# Altium PCB 8SoundsUSB.PcbDoc (part 1 of 3)
Units mm, origin at the board's own origin, x right, y up, seen from the top; angles counter-clockwise.
Board outline 126.1 x 74.1 mm, 4 copper layers (Top Layer, GND PLANE, POWER PLANE, Bottom Layer); 415 components, 227 nets, 1234 pads, 311 vias.
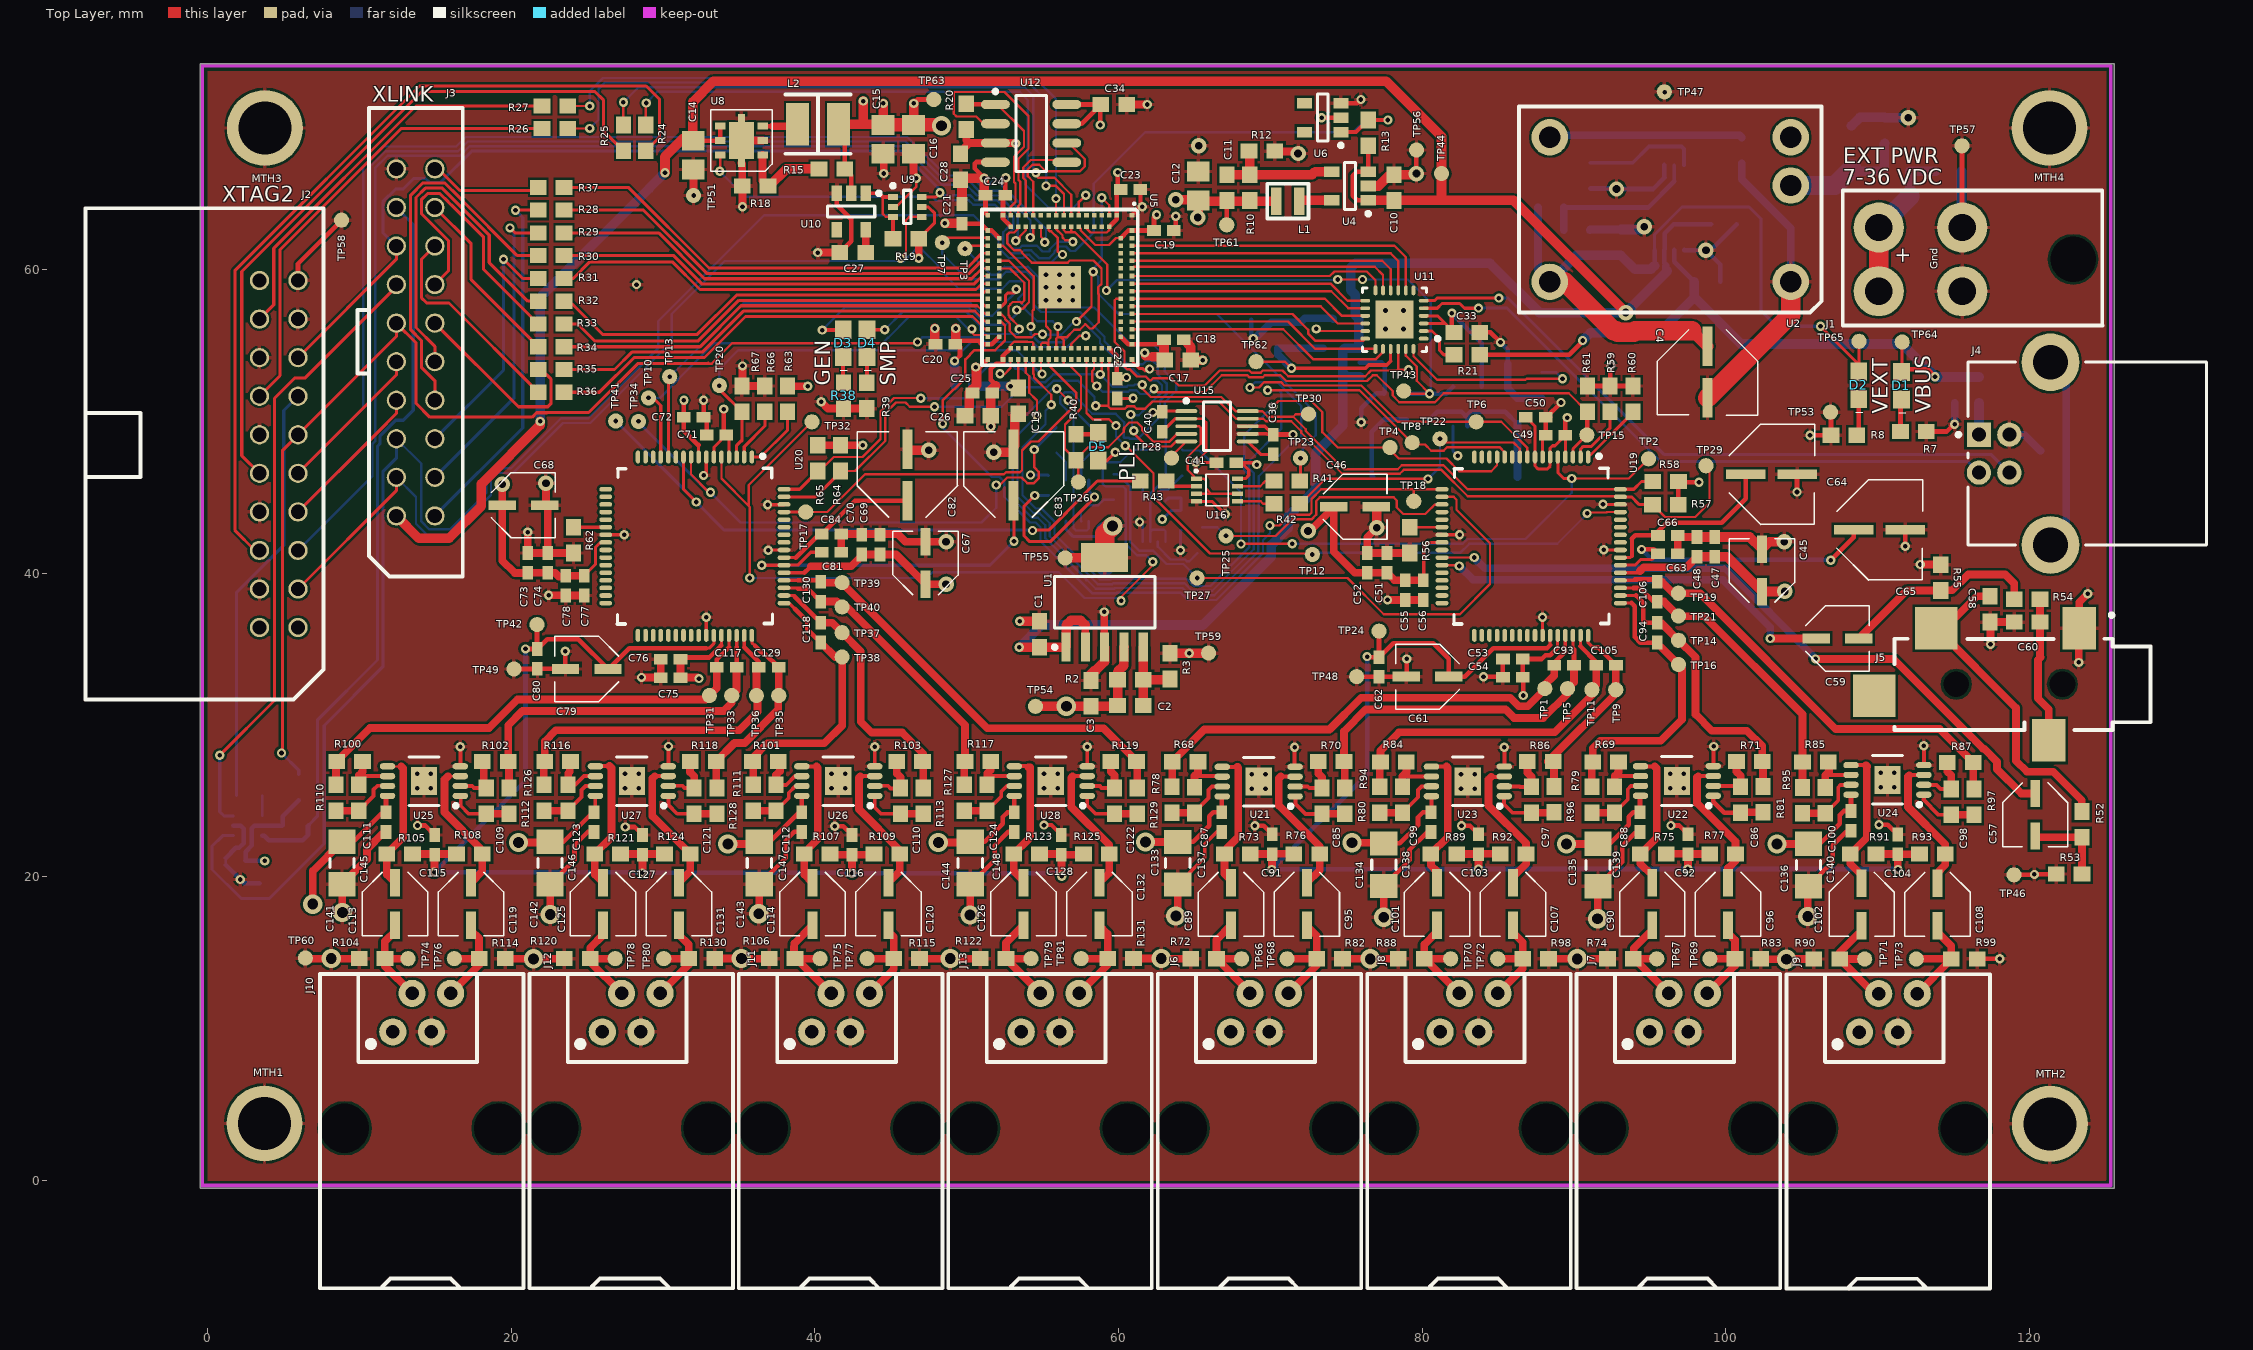
[diagram p0: Top Layer view]
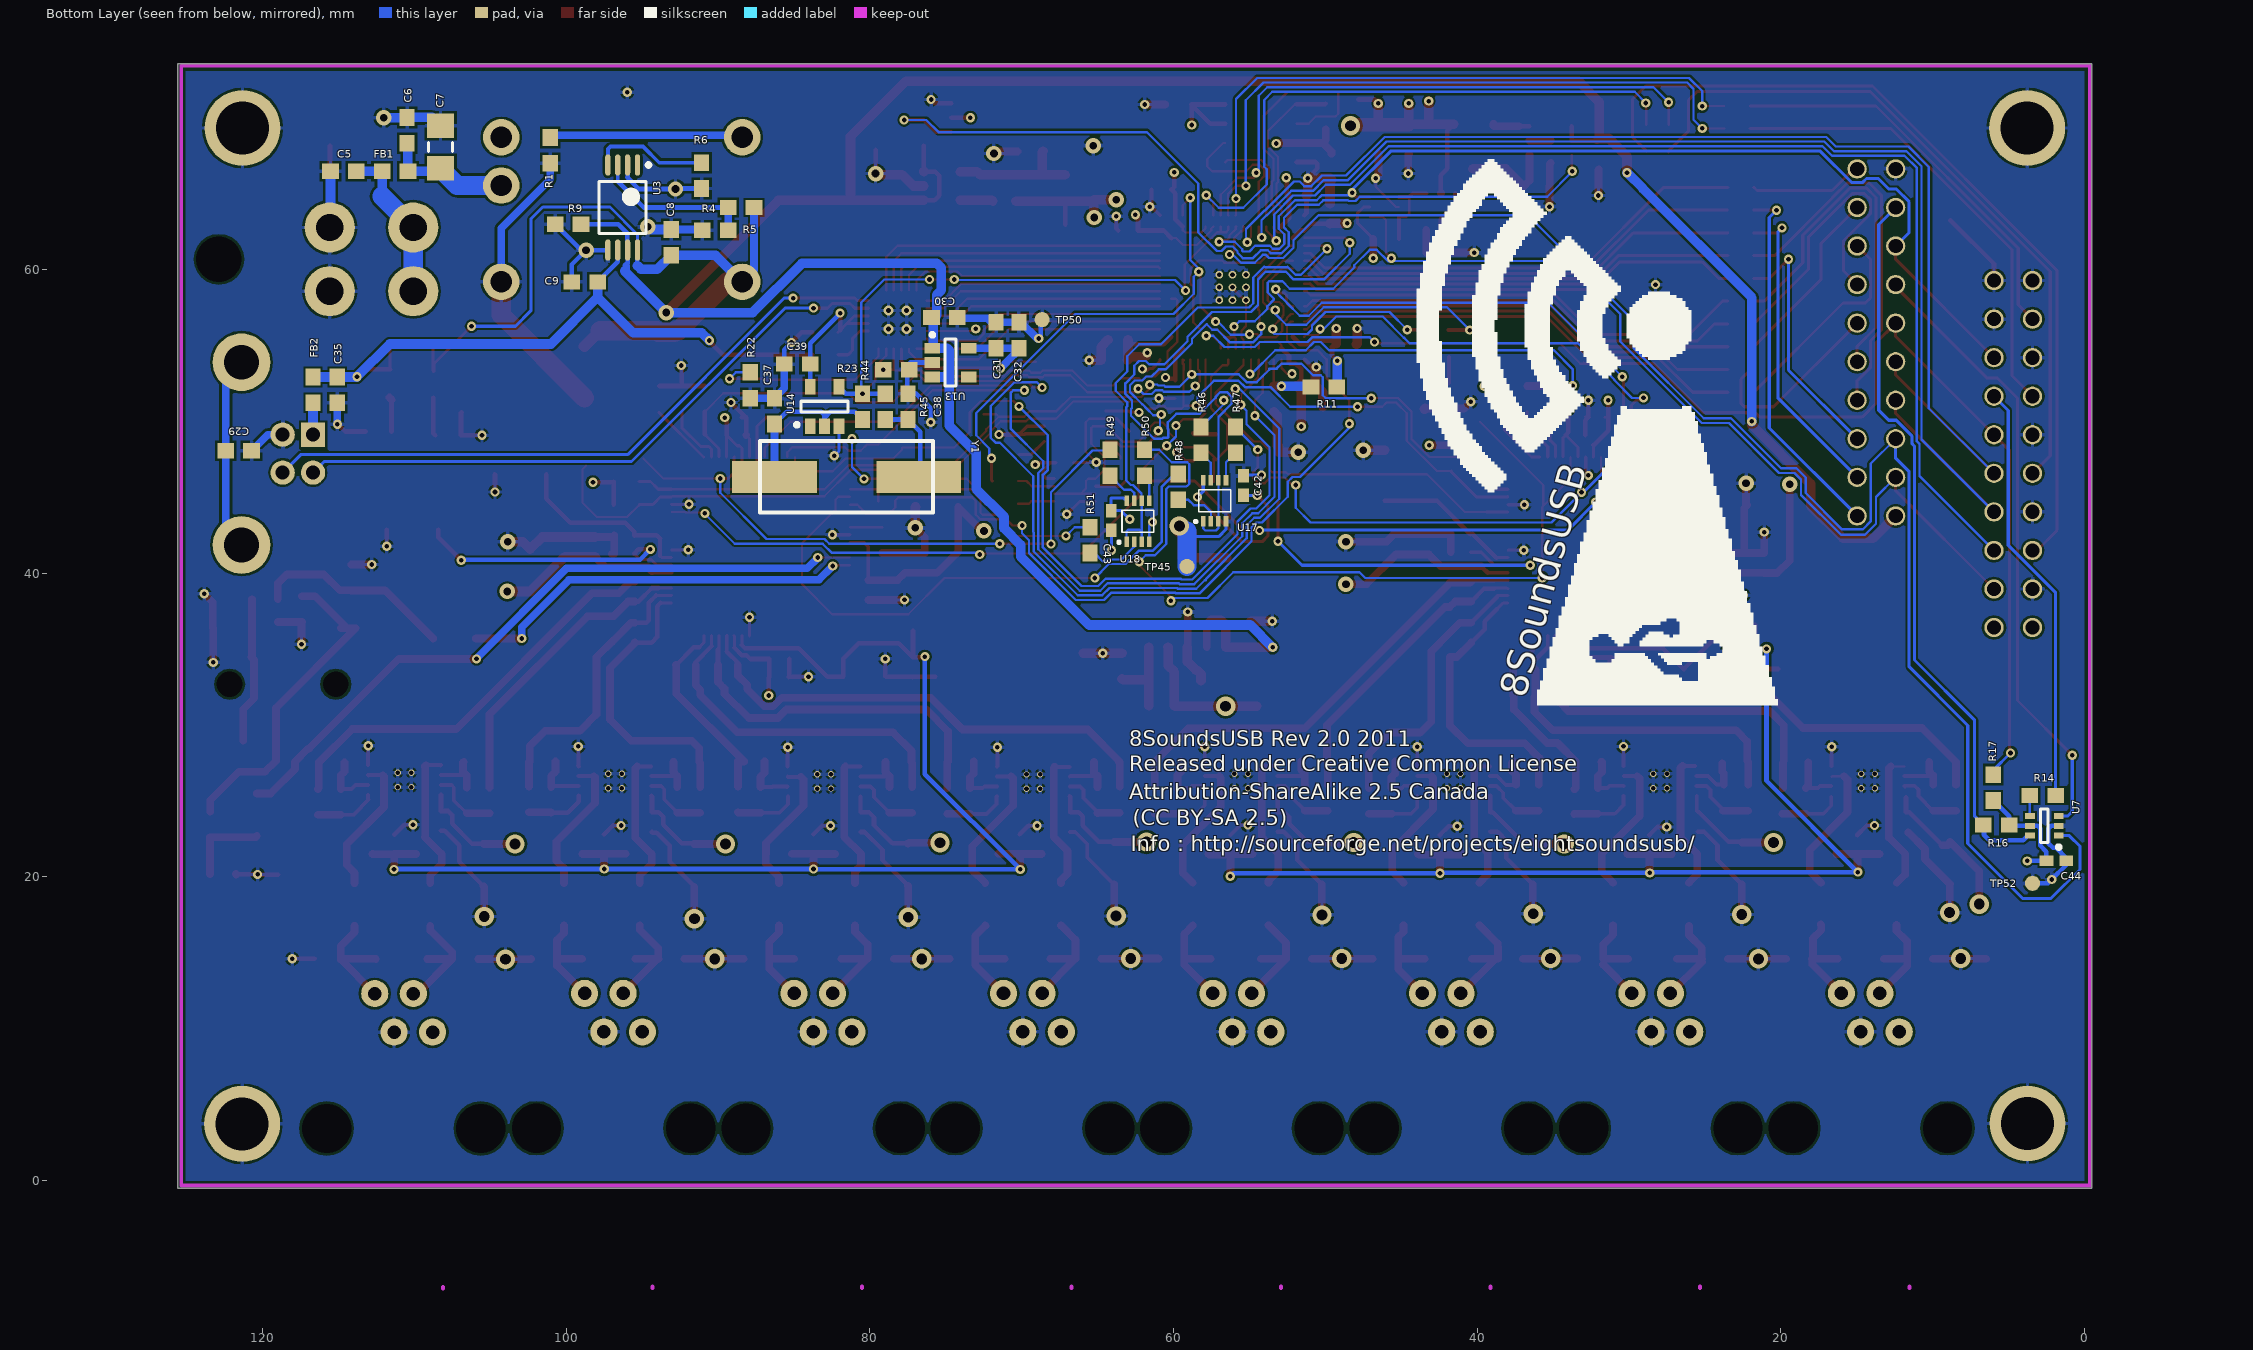
[diagram p1: Bottom Layer view, seen from below]
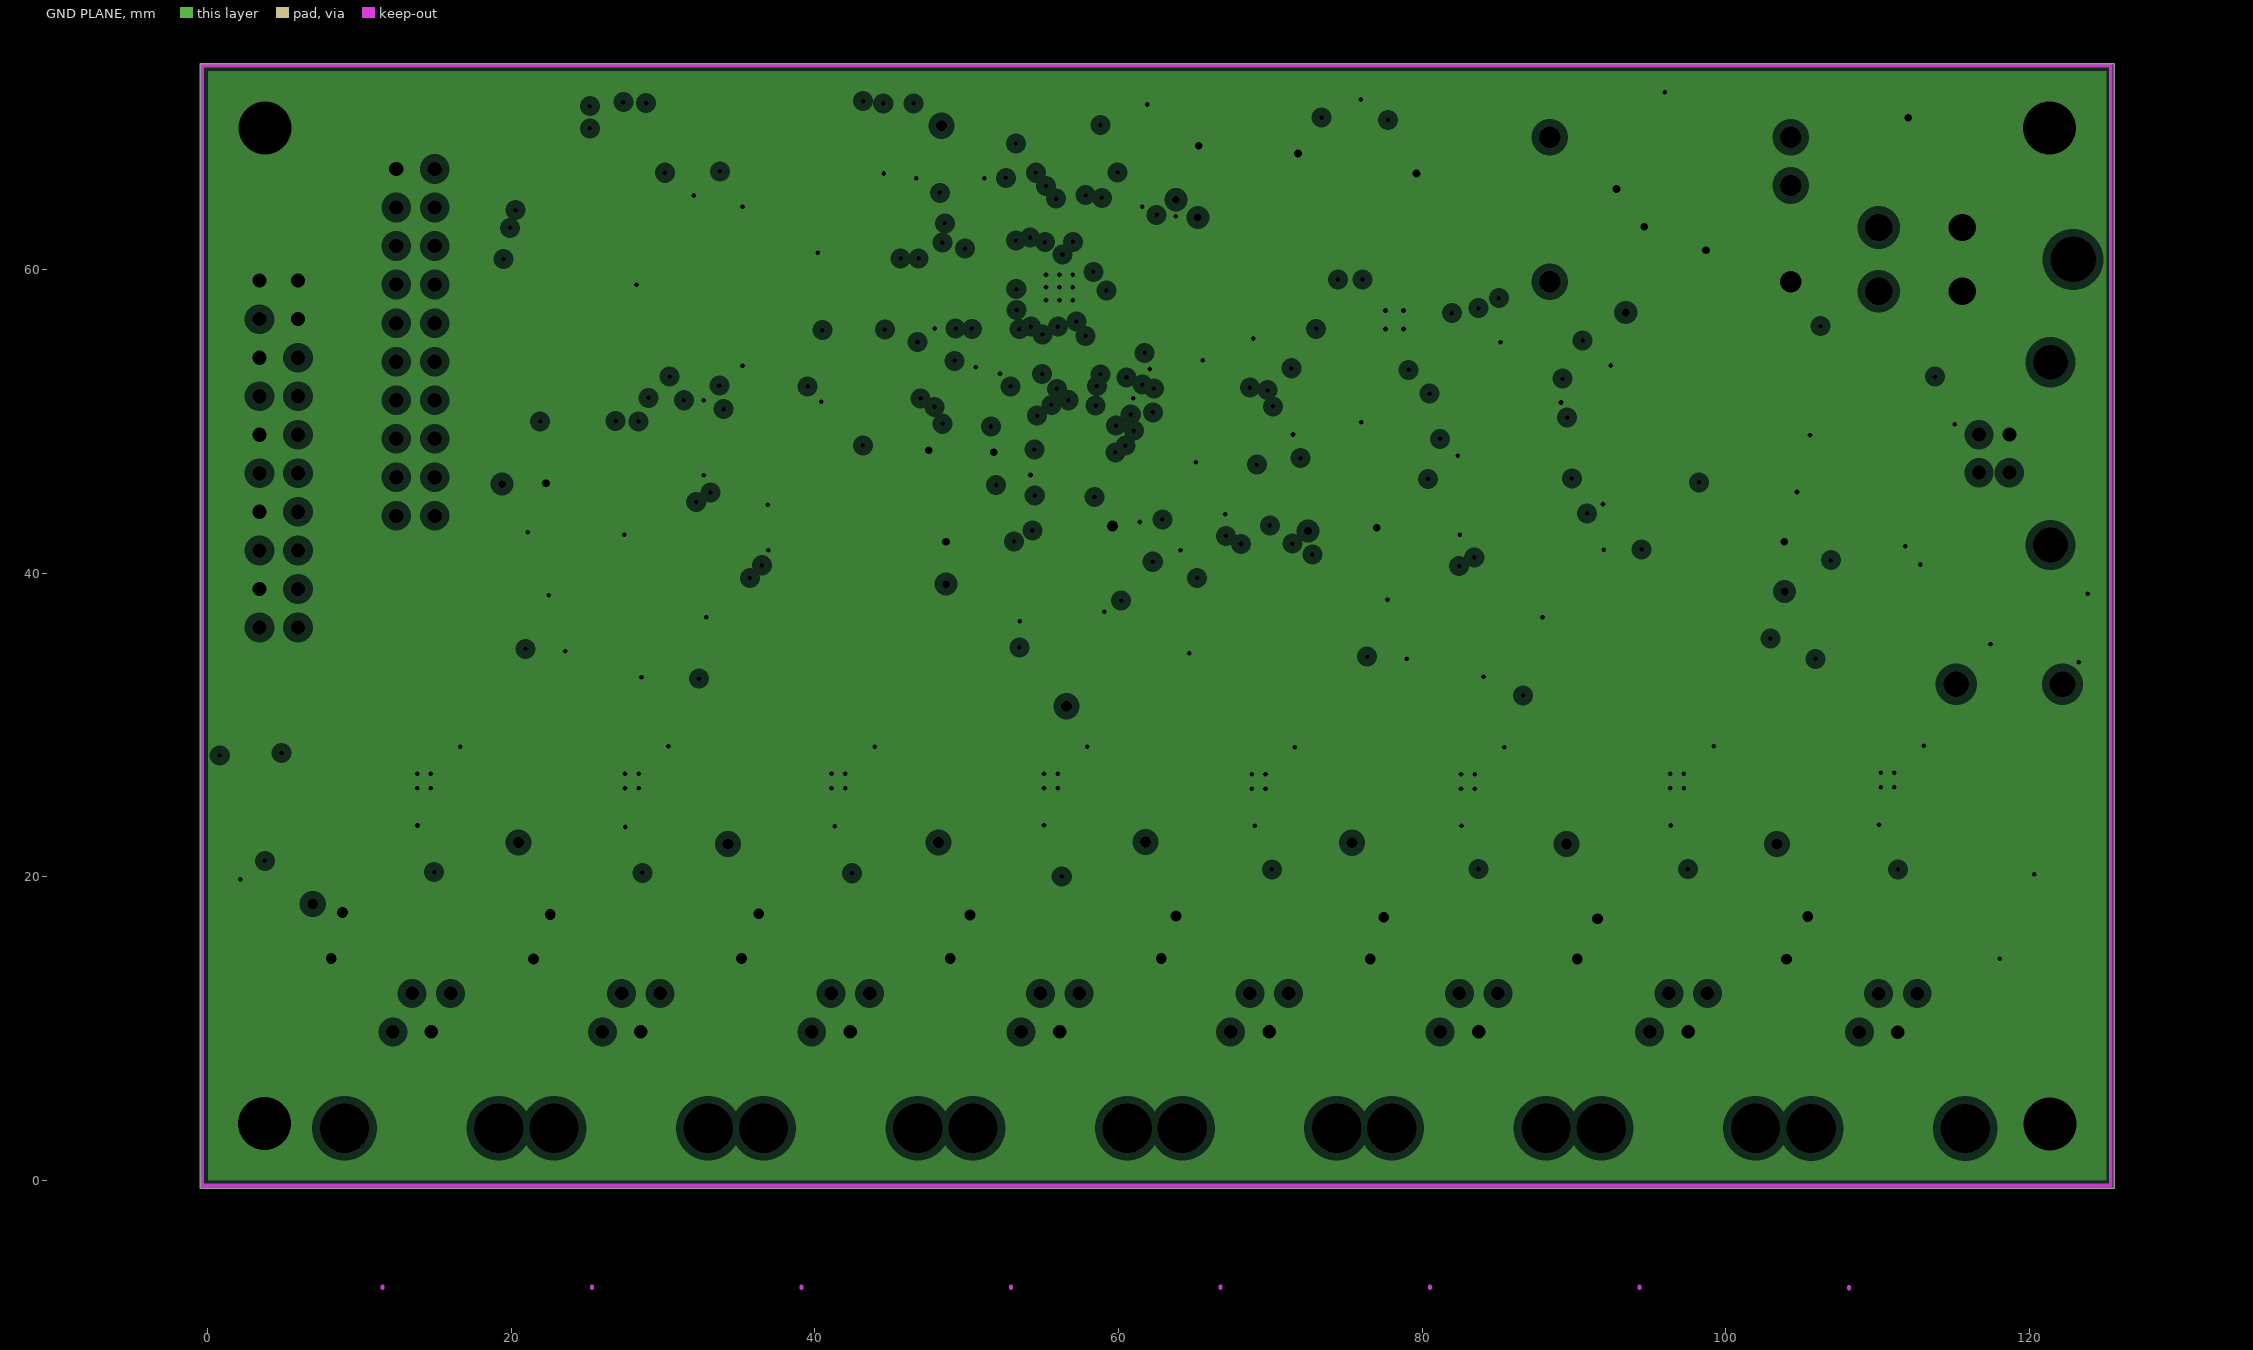
[diagram p2: GND PLANE, clearances drawn from the general rule]
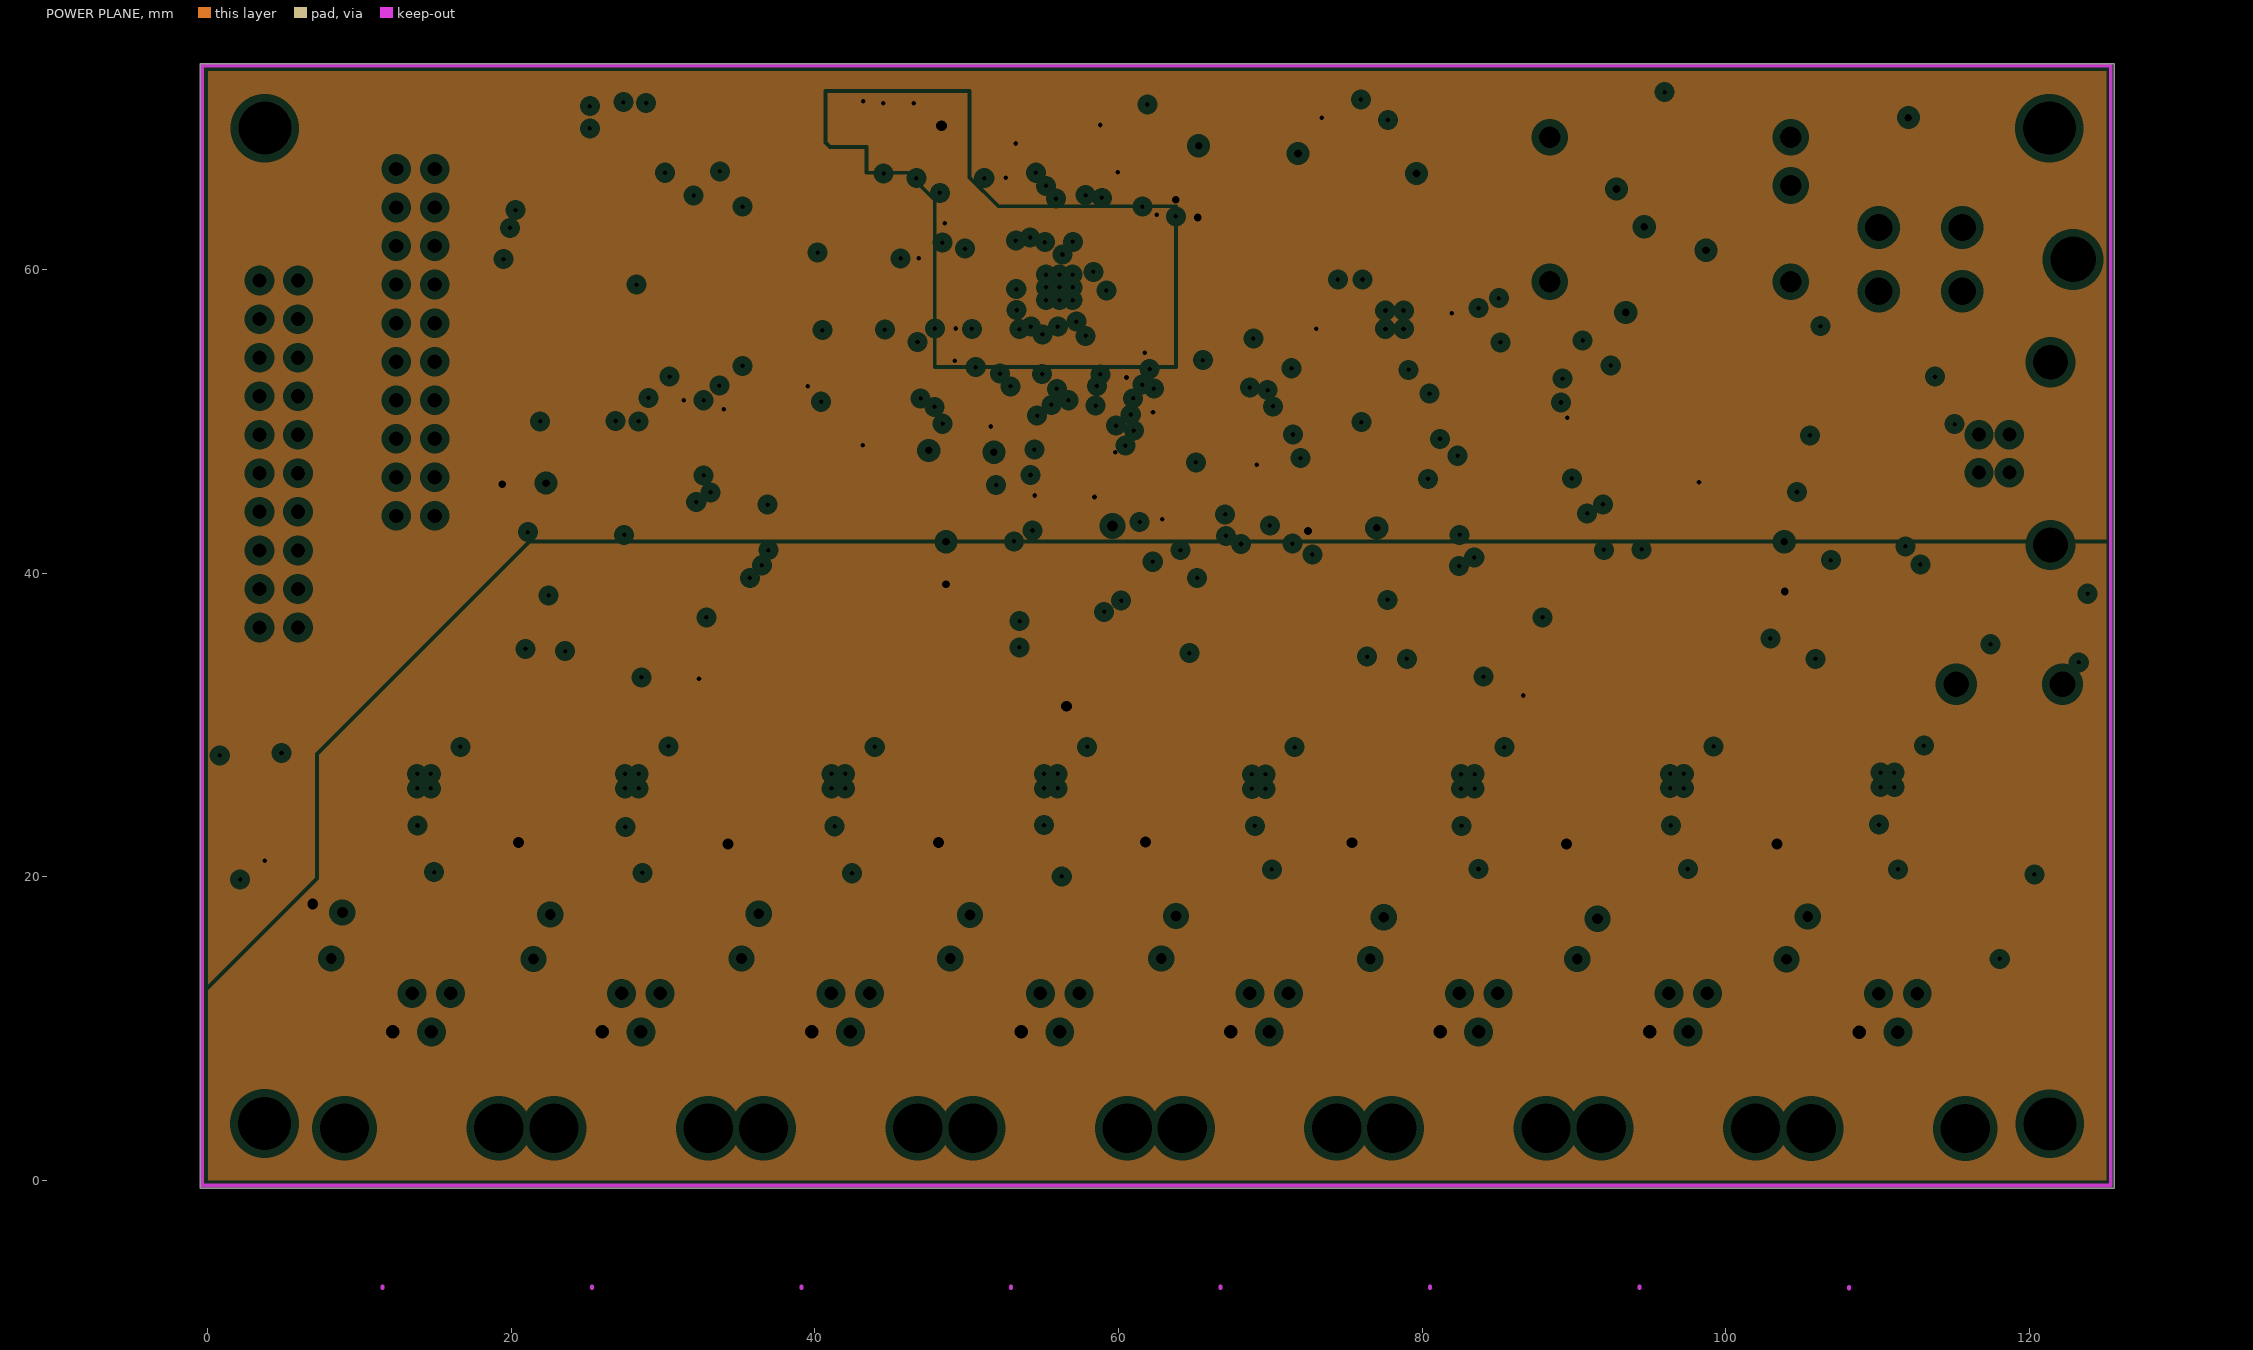
[diagram p3: POWER PLANE, clearances drawn from the general rule]

## Layer stack, top to bottom
Top Layer: signal copper 0.0356
Dielectric: core 0.32, FR-4, Dk 4.8
GND PLANE: plane copper 0.0356, net GND
Dielectric: prepreg 0.32, FR-4, Dk 4.8
POWER PLANE: plane copper 0.0356, net (Multiple Nets)
Dielectric: core 0.32, FR-4, Dk 4.8
Bottom Layer: signal copper 0.0356

## Board outline
-0.51,-0.507 125.59,-0.507 125.59,73.593 -0.51,73.593

## Design rules (kind name [scope] priority, off if disabled: settings)
Clearance [All] p1: gap=0.152
ComponentClearance [All] p1: gap=0.127 collisioncheckmode=3 verticalgap=0.254 showdistances=FALSE
DiffPairsRouting [All] p1: maxlimit=2.54 minlimit=0.254 mostfreqgap=0.254 maxuncoupledlength=12.7
PlaneClearance [All] p1: clearance=0.508
PlaneConnect [All] p1: planeconnectstyle=Direct reliefexpansion=0.508 reliefentries=4 reliefconductorwidth=0.254 reliefairgap=0.254
PolygonConnect [All] p1: connectstyle=Relief reliefconductorwidth=0.254 reliefentries=4 polygonreliefangle="90 Angle"
RoutingVias [All] p1: holewidth=0.305 width=0.61 viastyle="Through Hole" minholewidth=0.305 minwidth=0.61 maxholewidth=1.27 maxwidth=2.54
SilkToSilkClearance [All] p1: silktosilkclearance=0.127
SilkscreenOverComponentPads [All] p1: minsilkscreentomaskgap=0.127
SolderMaskExpansion [All] p1: expansion=0.102
Width [All] p1: maxlimit=1.27 minlimit=0.152 preferedwidth=0.152
22 further rules are at their usual default settings.

## Classes and differential pairs
component class XS1_XCORE1: D3 D4 D5 R28 R29 R30 R31 R32 R33 R34 R35 R36 R37 R38 R39 R40
component class XS1_XCORE0: C28 C29 C30 C31 C32 C33 C34 C35 FB2 J4 R20 R21 R22 R23 R24 R25 R26 R27 U11 U12 U13
component class XS1_SYSTEM: C10 C11 C12 C13 C14 C15 C16 C17 C18 C19 C20 C21 C22 C23 C24 C25 C26 C27 Designator2 J2 J3 L1 L2 R10 R11 R12 R13 R14 R15 R16 R17 R18 R19 U4 U5 U6 U7 U8 U9 U10
component class PREAMP1: C109 C110 C111 C112 C113 C114 C115 C116 C117 C118 C119 C120 C121 C122 C123 C124 C125 C126 C127 C128 C129 C130 C131 C132 C141 C142 C143 C144 C145 C146 C147 C148 J10 J11 J12 J13 R100 R101 R102 R103 R104 R105 R106 R107 R108 R109 R110 R111 R112 R113 R114 R115 R116 R117 R118 R119 R120 R121 R122 R123 R124 R125 R126 R127 R128 R129 R130 R131 TP74 TP75 TP76 TP77 TP78 TP79 TP80 TP81 U25 U26 U27 U28
component class PREAMP0: C85 C86 C87 C88 C89 C90 C91 C92 C93 C94 C95 C96 C97 C98 C99 C100 C101 C102 C103 C104 C105 C106 C107 C108 C133 C134 C135 C136 C137 C138 C139 C140 J6 J7 J8 J9 R68 R69 R70 R71 R72 R73 R74 R75 R76 R77 R78 R79 R80 R81 R82 R83 R84 R85 R86 R87 R88 R89 R90 R91 R92 R93 R94 R95 R96 R97 R98 R99 TP66 TP67 TP68 TP69 TP70 TP71 TP72 TP73 U21 U22 U23 U24
component class CLOCKING: C36 C37 C38 C39 C40 C41 C42 C43 C44 R41 R42 R43 R44 R45 R46 R47 R48 R49 R50 R51 U14 U15 U16 U17 U18 Y1
component class CODEC0: C45 C46 C47 C48 C49 C50 C51 C52 C53 C54 C55 C56 C57 C58 C59 C60 C61 C62 C63 C64 C65 C66 J5 R52 R53 R54 R55 R56 R57 R58 R59 R60 R61 U19
component class CODEC1: C67 C68 C69 C70 C71 C72 C73 C74 C75 C76 C77 C78 C79 C80 C81 C82 C83 C84 R62 R63 R64 R65 R66 R67 U20
component class MAIN_POWER: C1 C2 C3 C4 C5 C6 C7 C8 C9 D1 D2 FB1 J1 MTH1 MTH2 MTH3 MTH4 R1 R2 R3 R4 R5 R6 R7 R8 R9 TP1 TP2 TP3 TP4 TP5 TP6 TP7 TP8 TP9 TP10 TP11 TP12 TP13 TP14 TP15 TP16 TP17 TP18 TP19 TP20 TP21 TP22 TP23 TP24 TP25 TP26 TP27 TP28 TP29 TP30 TP31 TP32 TP33 TP34 TP35 TP36 TP37 TP38 TP39 TP40 TP41 TP42 TP43 TP44 TP45 TP46 TP47 TP48 TP49 TP50 TP51 TP52 TP53 TP54 TP55 TP56 TP57 TP58 TP59 TP60 TP61 TP62 TP63 TP64 TP65 U1 U2 U3

## Components (designator, comment, footprint, x,y, rotation, side; value= is the part's Value field where it differs from the comment)
C1 "" 3-0603 54.79,35.993 r270 top
C2 "" 3-0603 60.79,31.293 r180 top
C3 "" 3-0603 58.19,32.093 r270 top
C4 "Cap Pol1" AL_ELEC_SMD_D 98.806,53.264 r90 top
C5 "" 3-0603 114.69,66.493 r180 bottom
C6 "" 3-0603 110.49,69.193 r270 bottom
C7 "" 8-1206 108.29,68.093 r270 bottom
C8 "" 3-0603 93.09,61.809 r270 bottom
C9 "" 3-0603 98.79,59.209 r180 bottom
C10 "" 3-0603 78.152,65.425 r270 top
C11 "" 3-0603 67.152,65.425 r270 top
C12 "" 6-0805 65.252,65.525 r270 top
C13 "" 3-0603 53.39,51.366 r90 top
C14 "" 6-0805 31.979,67.564 r90 top
C15 "" 6-0805 44.49,68.593 r90 top
C16 "" 6-0805 46.49,68.593 r90 top
C17 "" 3-0603 63.906,54.051 r180 top
C18 "" 2-0402 63.652,55.397 r180 top
C19 "" 2-0402 62.99,62.593 r180 top
C20 "" 2-0402 48.59,55.093 r0 top
C21 "" 2-0402 49.69,63.693 r270 top
C22 "" 2-0402 59.919,52.172 r90 top
C23 "" 2-0402 60.79,65.293 r180 top
C24 "" 2-0402 51.89,64.915 r0 top
C25 "" 2-0402 51.036,51.885 r0 top
C26 "" 3-0603 50.736,50.384 r0 top
C27 "" 3-0603 42.49,61.143 r0 top
C28 "" 3-0603 49.59,66.793 r90 top
C29 "" 3-0603 121.59,48.082 r0 bottom
C30 "" 3-0603 75.092,56.869 r0 bottom
C31 "" 3-0603 71.686,55.693 r270 bottom
C32 "" 3-0603 70.186,55.693 r270 bottom
C33 "" 3-0603 82.956,55.88 r180 top
C34 "" 3-0603 59.69,70.893 r180 top
C35 "" 3-0603 115.09,52.093 r90 bottom
C36 "" 2-0402 70.19,48.493 r270 top
C37 "" 3-0603 86.29,50.693 r270 bottom
C38 "" 3-0603 77.49,50.993 r270 bottom
C39 "" 3-0603 84.79,53.79 r180 bottom
C40 "" 2-0402 62.89,49.993 r90 top
C41 "" 2-0402 67.103,47.293 r0 top
C42 "" 2-0402 55.39,45.793 r270 bottom
C43 "" 2-0402 64.11,43.485 r90 bottom
C44 "" 2-0402 1.83,21.069 r0 bottom
C45 "Cap Pol1" AL_ELEC_SMD_B 102.39,40.193 r270 top
C46 "Cap Pol1" AL_ELEC_SMD_B 75.59,44.393 r180 top
C47 "" 2-0402 99.289,41.75 r270 top
C48 "" 2-0402 98.114,41.75 r270 top
C49 "" 2-0402 88.79,49.093 r0 top
C50 "" 2-0402 87.49,50.293 r180 top
C51 "" 2-0402 77.69,40.693 r270 top
C52 "" 2-0402 76.39,40.693 r270 top
C53 "" 2-0402 85.977,34.36 r0 top
C54 "" 2-0402 85.977,33.16 r0 top
C55 "" 2-0402 78.89,38.893 r90 top
C56 "" 2-0402 80.09,38.893 r90 top
C57 "Cap Pol1" AL_ELEC_SMD_B 120.396,24.105 r90 top
C58 "" 3-0603 117.424,37.643 r90 top
C59 "Cap Pol1" AL_ELEC_SMD_B 107.366,35.712 r180 top
C60 "" 3-0603 119.857,36.793 r0 top
C61 "Cap Pol1" AL_ELEC_SMD_B 80.366,33.198 r0 top
C62 "" 2-0402 77.165,33.833 r90 top
C63 "" 2-0402 96.19,41.301 r180 top
C64 "Cap Pol1" AL_ELEC_SMD_D 103.024,46.533 r180 top
C65 "Cap Pol1" AL_ELEC_SMD_D 110.134,42.875 r180 top
C66 "" 2-0402 96.19,42.501 r180 top
C67 "Cap Pol1" AL_ELEC_SMD_B 47.29,40.693 r270 top
C68 "Cap Pol1" AL_ELEC_SMD_B 20.79,44.493 r180 top
C69 "" 2-0402 44.29,41.893 r270 top
C70 "" 2-0402 43.09,41.893 r270 top
C71 "" 2-0402 33.513,49.119 r0 top
C72 "" 2-0402 32.009,50.293 r180 top
C73 "" 2-0402 21.09,40.693 r270 top
C74 "" 2-0402 22.39,40.693 r270 top
C75 "" 2-0402 30.495,33.136 r0 top
C76 "" 2-0402 30.495,34.336 r0 top
C77 "" 2-0402 24.79,39.193 r90 top
C78 "" 2-0402 23.59,39.193 r90 top
C79 "Cap Pol1" AL_ELEC_SMD_B 24.968,33.706 r0 top
C80 "" 2-0402 21.717,34.366 r90 top
C81 "" 2-0402 41.09,41.393 r180 top
C82 "Cap Pol1" AL_ELEC_SMD_D 46.09,46.493 r270 top
C83 "Cap Pol1" AL_ELEC_SMD_D 53.09,46.493 r270 top
C84 "" 2-0402 41.09,42.593 r180 top
C85 "" 3-0603 73.41,25.009 r90 top
C86 "" 3-0603 100.987,25.084 r90 top
C87 "" 3-0603 65.01,25.059 r90 top
C88 "" 3-0603 92.687,25.084 r90 top
C89 "Cap Pol1" AL_ELEC_SMD_B 67.41,18.209 r90 top
C90 "Cap Pol1" AL_ELEC_SMD_B 95.162,18.209 r90 top
C91 "" 2-0402 70.118,22.158 r270 top
C92 "" 2-0402 97.518,22.158 r270 top
C93 "" 2-0402 89.357,33.96 r180 top
C94 "" 2-0402 95.49,36.093 r270 top
C95 "Cap Pol1" AL_ELEC_SMD_B 72.41,18.209 r90 top
C96 "Cap Pol1" AL_ELEC_SMD_B 100.162,18.209 r90 top
C97 "" 3-0603 87.211,25.084 r90 top
C98 "" 3-0603 114.862,24.945 r90 top
C99 "" 3-0603 78.711,25.084 r90 top
C100 "" 3-0603 106.562,25.045 r90 top
C101 "Cap Pol1" AL_ELEC_SMD_B 80.986,18.209 r90 top
C102 "Cap Pol1" AL_ELEC_SMD_B 108.962,18.195 r90 top
C103 "" 2-0402 83.718,22.158 r270 top
C104 "" 2-0402 111.342,22.144 r270 top
C105 "" 2-0402 92.126,33.96 r180 top
C106 "" 2-0402 95.49,38.793 r270 top
C107 "Cap Pol1" AL_ELEC_SMD_B 85.986,18.209 r90 top
C108 "Cap Pol1" AL_ELEC_SMD_B 113.962,18.195 r90 top
C109 "" 3-0603 18.34,25.018 r90 top
C110 "" 3-0603 45.64,25.018 r90 top
C111 "" 3-0603 9.94,25.218 r90 top
C112 "" 3-0603 37.44,25.218 r90 top
C113 "Cap Pol1" AL_ELEC_SMD_B 12.34,18.218 r90 top
C114 "Cap Pol1" AL_ELEC_SMD_B 39.84,18.218 r90 top
C115 "" 2-0402 14.94,22.118 r270 top
C116 "" 2-0402 42.44,22.118 r270 top
C117 "" 2-0402 34.188,33.807 r180 top
C118 "" 2-0402 40.39,36.093 r270 top
C119 "Cap Pol1" AL_ELEC_SMD_B 17.34,18.218 r90 top
C120 "Cap Pol1" AL_ELEC_SMD_B 44.84,18.218 r90 top
C121 "" 3-0603 32.04,25.018 r90 top
C122 "" 3-0603 59.74,25.018 r90 top
C123 "" 3-0603 23.74,25.218 r90 top
C124 "" 3-0603 51.34,25.218 r90 top
C125 "Cap Pol1" AL_ELEC_SMD_B 26.04,18.218 r90 top
C126 "Cap Pol1" AL_ELEC_SMD_B 53.74,18.218 r90 top
C127 "" 2-0402 28.64,22.118 r270 top
C128 "" 2-0402 56.24,22.118 r270 top
C129 "" 2-0402 36.957,33.807 r180 top
C130 "" 2-0402 40.39,38.793 r270 top
C131 "Cap Pol1" AL_ELEC_SMD_B 31.04,18.218 r90 top
C132 "Cap Pol1" AL_ELEC_SMD_B 58.74,18.218 r90 top
C133 "" 8-1206 63.91,20.909 r90 top
C134 "" 8-1206 77.486,20.809 r90 top
C135 "" 8-1206 91.587,20.784 r90 top
C136 "" 8-1206 105.462,20.795 r90 top
C137 "" 2-0402 66.81,23.609 r90 top
C138 "" 2-0402 80.586,23.609 r90 top
C139 "" 2-0402 94.362,23.609 r90 top
C140 "" 2-0402 108.262,23.695 r90 top
C141 "" 8-1206 8.84,20.918 r90 top
C142 "" 8-1206 22.54,20.918 r90 top
C143 "" 8-1206 36.34,20.918 r90 top
C144 "" 8-1206 50.24,20.918 r90 top
C145 "" 2-0402 11.74,23.618 r90 top
C146 "" 2-0402 25.44,23.618 r90 top
C147 "" 2-0402 39.14,23.618 r90 top
C148 "" 2-0402 53.14,23.618 r90 top
D1 "VBUS" LED_0603 111.607,53.289 r270 top
D2 "VEXT" LED_0603 108.788,53.311 r270 top
D3 "GEN" LED_0603 41.884,56.079 r270 top
D4 "SMP" LED_0603 43.459,56.079 r270 top
D5 "PLL" LED_0603 58.649,47.422 r90 top
FB1 "300R-1200mA" 3-0603 111.29,66.493 r0 bottom
FB2 "300R-1200mA" 3-0603 116.69,52.093 r90 bottom
J1 "Molex" MOLEX-P4 110.09,58.593 r90 top
J2 "XTAG2IN(PLUG)" HEADER-2X10-100mil 5.944,59.309 r0 top
J3 "XTAG2OUT(SOCKET)" HEADER-2X10-100mil_STRAIGHT 12.421,43.79 r0 top
J4 "2411 02" 787924 117.69,47.893 r0 top
J5 "SJ-3524-SMT" SJ-3524-SMT 122.19,32.693 r180 top
J6 "RJ-11" RJ11 67.39,9.793 r0 top
J7 "RJ-11" RJ11 94.99,9.793 r0 top
J8 "RJ-11" RJ11 81.19,9.793 r0 top
J9 "RJ-11" RJ11 108.814,9.779 r0 top
J10 "RJ-11" RJ11 12.19,9.793 r0 top
J11 "RJ-11" RJ11 39.79,9.793 r0 top
J12 "RJ-11" RJ11 25.99,9.793 r0 top
J13 "RJ-11" RJ11 53.59,9.793 r0 top
L1 "Inductor" Inductor 71.152,64.525 r180 top
L2 "Inductor" INDUCTOR_1515 38.054,67.646 r0 top
MTH1 "PTH-M3" "Mounting Hole" 3.734,3.759 r0 top
MTH2 "PTH-M3" "Mounting Hole" 121.361,3.734 r0 top
MTH3 "PTH-M3" "Mounting Hole" 3.759,69.342 r0 top
MTH4 "PTH-M3" "Mounting Hole" 121.336,69.342 r0 top
R1 "" 3-0603 101.067,67.869 r270 bottom
R2 "" 3-0603 60.79,32.993 r0 top
R3 "" 3-0603 63.39,33.893 r90 top
R4 "" 3-0603 88.49,64.109 r180 bottom
R5 "" 3-0603 90.19,62.609 r180 bottom
R6 "" 3-0603 91.09,66.209 r90 bottom
R7 "" 3-0603 112.37,49.352 r0 top
R8 "" 3-0603 107.789,49.101 r180 top
R9 "" 3-0603 99.89,63.009 r0 bottom
R10 "" 3-0603 68.652,65.425 r90 top
R11 "" 3-0603 50.089,52.273 r0 bottom
R12 "" 3-0603 69.452,67.825 r0 top
R13 "" 3-0603 76.452,69.025 r90 top
R14 "" 3-0603 2.73,25.369 r180 bottom
R15 "" 3-0603 41.123,66.65 r180 top
R16 "" 3-0603 5.791,23.419 r0 bottom
R17 "" 3-0603 5.99,25.893 r270 bottom
R18 "" 3-0603 36.052,65.516 r180 top
R19 "" 3-0603 45.99,62.043 r0 top
R20 "" 3-0603 49.971,70.093 r90 top
R21 "" 3-0603 82.956,54.407 r180 top
R22 "" 3-0603 87.89,52.393 r270 bottom
R23 "" 3-0603 78.263,53.414 r180 bottom
R24 "" 3-0603 28.854,68.693 r90 top
R25 "" 3-0603 27.381,68.693 r90 top
R26 "" 3-0603 22.872,69.317 r0 top
R27 "" 3-0603 22.872,70.79 r0 top
R28 "" 3-0603 22.62,63.935 r0 top
R29 "" 3-0603 22.62,62.435 r0 top
R30 "" 3-0603 22.62,60.935 r0 top
R31 "" 3-0603 22.62,59.435 r0 top
R32 "" 3-0603 22.62,57.935 r0 top
R33 "" 3-0603 22.62,56.435 r0 top
R34 "" 3-0603 22.62,54.935 r0 top
R35 "" 3-0603 22.62,53.435 r0 top
R36 "" 3-0603 22.62,51.935 r0 top
R37 "" 3-0603 22.62,65.435 r0 top
R38 "" 3-0603 41.885,51.714 r90 top
R39 "" 3-0603 43.417,51.715 r90 top
R40 "" 3-0603 57.199,48.311 r90 top
R41 "" 3-0603 71.09,46.093 r180 top
R42 "" 3-0603 71.09,44.593 r180 top
R43 "" 3-0603 62.29,46.093 r0 top
R44 "" 3-0603 80.49,50.993 r270 bottom
R45 "" 3-0603 78.99,50.993 r270 bottom
R46 "" 3-0603 58.19,48.793 r270 bottom
R47 "" 3-0603 55.917,48.793 r270 bottom
R48 "" 3-0603 59.69,45.693 r270 bottom
R49 "" 3-0603 64.19,47.293 r270 bottom
R50 "" 3-0603 61.917,47.293 r270 bottom
R51 "" 3-0603 65.507,42.189 r270 bottom
R52 "" 3-0603 123.469,23.47 r90 top
R53 "" 3-0603 122.631,20.193 r180 top
R54 "" 3-0603 119.857,38.293 r0 top
R55 "" 3-0603 114.173,39.726 r90 top
R56 "" 3-0603 79.19,42.193 r270 top
R57 "" 3-0603 96.037,44.526 r0 top
R58 "" 3-0603 96.049,46.05 r0 top
R59 "" 3-0603 92.39,51.493 r270 top
R60 "" 3-0603 93.89,51.493 r270 top
R61 "" 3-0603 90.89,51.493 r270 top
R62 "" 3-0603 24.09,42.193 r270 top
R63 "" 3-0603 38.19,51.493 r90 top
R64 "" 3-0603 41.69,47.593 r90 top
R65 "" 3-0603 40.19,47.593 r90 top
R66 "" 3-0603 36.69,51.493 r270 top
R67 "" 3-0603 35.19,51.493 r270 top
R68 "" 3-0603 64.382,27.592 r0 top
R69 "" 3-0603 92.087,27.584 r0 top
R70 "" 3-0603 74.01,27.609 r180 top
R71 "" 3-0603 101.562,27.609 r180 top
R72 "" 3-0603 65.61,14.609 r0 top
R73 "" 3-0603 67.832,21.523 r180 top
R74 "" 3-0603 93.062,14.609 r0 top
R75 "" 3-0603 95.232,21.523 r180 top
R76 "" 3-0603 72.404,21.523 r180 top
R77 "" 3-0603 99.804,21.523 r180 top
R78 "" 3-0603 63.532,25.086 r270 top
R79 "" 3-0603 91.187,25.084 r270 top
R80 "" 3-0603 74.91,25.009 r270 top
R81 "" 3-0603 102.462,25.109 r270 top
R82 "" 3-0603 73.91,14.609 r180 top
R83 "" 3-0603 101.462,14.609 r180 top
R84 "" 3-0603 78.111,27.584 r0 top
R85 "" 3-0603 105.917,27.583 r0 top
R86 "" 3-0603 87.786,27.609 r180 top
R87 "" 3-0603 115.462,27.545 r180 top
R88 "" 3-0603 79.286,14.609 r0 top
R89 "" 3-0603 81.432,21.523 r180 top
R90 "" 3-0603 106.662,14.595 r0 top
R91 "" 3-0603 109.056,21.509 r180 top
R92 "" 3-0603 86.004,21.523 r180 top
R93 "" 3-0603 113.628,21.509 r180 top
R94 "" 3-0603 77.211,25.084 r270 top
R95 "" 3-0603 105.062,25.045 r270 top
R96 "" 3-0603 88.686,25.109 r270 top
R97 "" 3-0603 116.362,24.945 r270 top
R98 "" 3-0603 87.486,14.609 r180 top
R99 "" 3-0603 115.722,14.605 r180 top
R100 "" 3-0603 9.34,27.618 r0 top
R101 "" 3-0603 36.74,27.618 r0 top
R102 "" 3-0603 18.94,27.618 r180 top
R103 "" 3-0603 46.24,27.618 r180 top
R104 "" 3-0603 10.821,14.618 r0 top
R105 "" 3-0603 12.64,21.518 r180 top
R106 "" 3-0603 37.84,14.618 r0 top
R107 "" 3-0603 40.14,21.518 r180 top
R108 "" 3-0603 17.24,21.518 r180 top
R109 "" 3-0603 44.74,21.518 r180 top
R110 "" 3-0603 8.44,25.218 r270 top
R111 "" 3-0603 35.94,25.218 r270 top
R112 "" 3-0603 19.84,25.018 r270 top
R113 "" 3-0603 47.14,25.018 r270 top
R114 "" 3-0603 18.74,14.618 r180 top
R115 "" 3-0603 46.04,14.618 r180 top
R116 "" 3-0603 23.04,27.618 r0 top
R117 "" 3-0603 50.74,27.618 r0 top
R118 "" 3-0603 32.64,27.618 r180 top
R119 "" 3-0603 60.34,27.618 r180 top
R120 "" 3-0603 24.34,14.618 r0 top
R121 "" 3-0603 26.34,21.518 r180 top
R122 "" 3-0603 51.74,14.618 r0 top
R123 "" 3-0603 53.94,21.518 r180 top
R124 "" 3-0603 30.94,21.518 r180 top
R125 "" 3-0603 58.54,21.518 r180 top
R126 "" 3-0603 22.14,25.218 r270 top
R127 "" 3-0603 49.84,25.218 r270 top
R128 "" 3-0603 33.54,25.018 r270 top
R129 "" 3-0603 61.24,25.018 r270 top
R130 "" 3-0603 32.54,14.618 r180 top
R131 "" 3-0603 60.14,14.618 r180 top
TP1 "TP" TP 88.087,32.41 r0 top
TP2 "TP" TP 94.92,47.549 r0 top
TP3 "TP" TP 49.89,61.393 r270 top
TP4 "TP" TP 77.89,48.293 r0 top
TP5 "TP" TP 89.586,32.41 r0 top
TP6 "TP" TP 83.566,49.987 r0 top
TP7 "TP" TP 48.39,61.793 r270 top
TP8 "TP" TP 79.35,48.616 r0 top
TP9 "TP" TP 92.761,32.334 r0 top
TP10 "TP" TP 29.032,51.562 r0 top
TP11 "TP" TP 91.186,32.334 r0 top
TP12 "TP" TP 72.771,41.25 r0 top
TP13 "TP" TP 30.429,52.959 r0 top
TP14 "TP" TP 96.89,35.593 r0 top
TP15 "TP" TP 90.856,49.124 r0 top
TP16 "TP" TP 96.89,33.993 r0 top
TP17 "TP" TP 39.395,44.044 r0 top
TP18 "TP" TP 79.451,44.755 r0 top
TP19 "TP" TP 96.89,38.693 r0 top
TP20 "TP" TP 33.706,52.375 r0 top
TP21 "TP" TP 96.89,37.193 r0 top
TP22 "TP" TP 81.178,48.87 r0 top
TP23 "TP" TP 71.99,47.593 r0 top
TP24 "TP" TP 77.165,36.195 r0 top
TP25 "TP" TP 67.081,42.469 r0 top
TP26 "TP" TP 57.353,46.025 r0 top
TP27 "TP" TP 65.176,39.7 r270 top
TP28 "TP" TP 63.49,47.593 r0 top
TP29 "TP" TP 98.704,47.092 r0 top
TP30 "TP" TP 72.517,50.495 r0 top
TP31 "TP" TP 33.045,31.953 r0 top
TP32 "TP" TP 39.802,49.987 r0 top
TP33 "TP" TP 34.519,31.953 r0 top
TP34 "TP" TP 28.372,50.013 r0 top
TP35 "TP" TP 37.617,31.953 r0 top
TP36 "TP" TP 36.144,31.953 r0 top
TP37 "TP" TP 41.79,36.093 r0 top
TP38 "TP" TP 41.79,34.493 r0 top
TP39 "TP" TP 41.79,39.393 r0 top
TP40 "TP" TP 41.79,37.793 r0 top
TP41 "TP" TP 26.873,50.038 r0 top
TP42 "TP" TP 21.692,36.627 r0 top
TP43 "TP" TP 78.791,52.019 r0 top
TP44 "TP" TP 81.28,66.345 r90 top
TP45 "TP" TP 59.116,40.462 r180 bottom
TP46 "TP" TP 118.999,20.142 r0 top
TP47 "TP" TP 95.961,71.73 r0 top
TP48 "TP" TP 75.692,33.198 r0 top
TP49 "TP" TP 20.168,33.706 r0 top
TP50 "TP" TP 68.656,56.718 r180 bottom
TP51 "TP" TP 32.004,64.897 r0 top
TP52 "TP" TP 3.404,19.583 r180 bottom
TP53 "TP" TP 106.909,50.622 r0 top
TP54 "TP" TP 54.534,31.242 r0 top
TP55 "TP" TP 56.49,41.021 r0 top
TP56 "TP" TP 79.629,67.894 r0 top
TP57 "TP" TP 115.57,68.174 r0 top
TP58 "TP" TP 8.814,63.271 r0 top
TP59 "TP" TP 65.938,34.747 r0 top
TP60 "TP" TP 6.426,14.656 r0 top
TP61 "TP" TP 67.132,62.967 r0 top
TP62 "TP" TP 69.063,53.95 r0 top
TP63 "TP" TP 47.828,71.222 r0 top
TP64 "TP" TP 111.633,55.245 r0 top
TP65 "TP" TP 108.79,55.293 r0 top
TP66 "TP" TP 68.11,14.609 r90 top
TP67 "TP" TP 95.462,14.609 r0 top
TP68 "TP" TP 71.11,14.609 r90 top
TP69 "TP" TP 98.962,14.609 r0 top
TP70 "TP" TP 81.886,14.609 r0 top
TP71 "TP" TP 109.162,14.595 r0 top
TP72 "TP" TP 84.986,14.609 r0 top
TP73 "TP" TP 112.562,14.595 r0 top
TP74 "TP" TP 13.193,14.617 r0 top
TP75 "TP" TP 40.34,14.618 r0 top
TP76 "TP" TP 16.24,14.618 r0 top
TP77 "TP" TP 43.44,14.618 r0 top
TP78 "TP" TP 26.84,14.618 r0 top
TP79 "TP" TP 54.24,14.618 r0 top
TP80 "TP" TP 30.04,14.618 r0 top
TP81 "TP" TP 57.54,14.618 r0 top
U1 "TPS79501" SOT223-6L 59.09,38.093 r90 top
U2 "PTN78000W" PTN78000W 104.29,59.209 r180 top
U3 "TPS2111" TSOP65P640-8AL 96.29,64.109 r270 bottom
U4 "NCP1521B" SOT23-5AL_MOD(1-07) 75.252,65.525 r180 top
U5 "XS1_L2_124QFN" QFN-124 60.89,63.593 r270 top
U6 "NCP303LSN30T1G" SOT23-5AL_MOD(1-07) 73.452,70.025 r180 top
U7 "NC7SZ157P6X" SOT363-6L 2.63,23.369 r0 bottom
U8 "FAN2012" MLP-6-LEAD-3X3mm 36.552,69.466 r270 top
U9 "NC7WZ07P6X" SOT363-6L 46.09,64.143 r0 top
U10 "NCP303LSN09" SOT23-5AL_MOD(1-07) 42.39,63.843 r270 top
U11 "USB3318" QFN50P400X400-24V9L 78.181,56.718 r180 top
U12 "AT25DF041A-SSH" 8S1_L 54.243,68.993 r0 top
U13 "NCP699SN18" SOT23-5AL_MOD(1-07) 74.69,53.893 r180 bottom
U14 "NC7SZU04" SOT23-5AL_MOD(1-07-26) 82.99,50.993 r90 bottom
U15 "CS2300-CP" TSSOP50P490-10AL 66.49,49.693 r0 top
U16 "NC7NZ34" NC7NZ34 66.49,45.493 r270 top
U17 "NC7NZ34" NC7NZ34 57.29,44.793 r180 bottom
U18 "NC7NZ34" NC7NZ34 62.344,43.43 r180 bottom
U19 "CS42448" QFN50P1200X1200-64V1L-MOD 87.19,41.793 r270 top
U20 "CS42448" QFN50P1200X1200-64V1L-MOD 32.09,41.793 r270 top
U21 "LME49726MY" LME49726 69.235,26.284 r90 top
U22 "LME49726MY" LME49726 96.791,26.322 r90 top
U23 "LME49726MY" LME49726 83.018,26.295 r90 top
U24 "LME49726MY" LME49726 110.662,26.395 r90 top
U25 "LME49726MY" LME49726 14.24,26.318 r90 top
U26 "LME49726MY" LME49726 41.54,26.318 r90 top
U27 "LME49726MY" LME49726 27.94,26.318 r90 top
U28 "LME49726MY" LME49726 55.54,26.318 r90 top
Y1 "13MHz" X_TAL 86.284,46.355 r180 bottom

## Footprints (in the part's own frame and the unit in brackets; to place one, negate y for a bottom-side part, rotate by r counter-clockwise, add the part's x,y. Pads: shape width x height; smd on the part's side, far side on the other; paste and mask are expansions set on the pad)
2-0402 [mm] "Chip Resistor; Body 1 x 0.5 mm (LxW typ)"
  rect 0.9x0.7 smd: 1(-0.65,0) 2(0.65,0)
3-0603 [mm] "Chip Resistor; Body 1.6 x 0.9 mm (LxW typ)"
  rect 1.1x1 smd: 1(-0.85,0) 2(0.85,0)
6-0805 [mm] "Chip Resistor; Body 2 x 1.2 mm (LxW typ)"
  rect 1.3x1.5 smd: 1(-0.95,0) 2(0.95,0)
8-1206 [mm] "Chip Resistor; Body 3.1 x 1.6 mm (LxW typ)"
  rect 1.6x1.8 smd: 1(-1.4,0) 2(1.4,0)
  silkscreen extent -0.3,-0.8 0.3,0.8
8S1_L [mm] "8-Pin Small Outline Integrated Circuit 1.27 mm Pitch, IPC High Density"
  oval 1.9x0.6 smd: 1(-2.35,1.905) 2(-2.35,0.635) 3(-2.35,-0.635) 4(-2.35,-1.905) 5(2.35,-1.905) 6(2.35,-0.635) 7(2.35,0.635) 8(2.35,1.905)
  silkscreen extent -2.47,-2.5 1,2.88, body extent -1.95,-2.45 1.95,2.45, height 1.73
787924 [mm] "Connector; USB1.1, Type B, Thru-Hole; 4 Position; Right Angle"
  rect 1.6x1.6 hole 0.92: 1(-1,1.25)
  round 1.6 hole 0.92: 2(-1,-1.25) 3(1,-1.25) 4(1,1.25)
  round 3.8 hole 2.3: 5(3.71,6.02) 6(3.71,-6.02)
  silkscreen extent -2.47,-6.02 13.99,6.02
AL_ELEC_SMD_B [mm]
  rect 1.8x0.65 smd: 1(1.4,0) 2(-1.4,0)
  silkscreen extent -2.1,-2.15 2.1,2.15
AL_ELEC_SMD_D [mm]
  rect 2.6x0.65 smd: 1(1.7,0) 2(-1.7,0)
  silkscreen extent -2.85,-3.3 2.8,3.33
HEADER-2X10-100mil [mm]
  round 1.27 / inner round 1.016 / far side round 1.27 hole 0.94: 1(0,-22.875) 2(-2.54,-22.875) 3(0,-20.335) 4(-2.54,-20.335) 5(0,-17.795) 6(-2.54,-17.795) 7(0,-15.255) 8(-2.54,-15.255) 9(0,-12.715) 10(-2.54,-12.715) 11(0,-10.175) 12(-2.54,-10.175) 13(0,-7.635) 14(-2.54,-7.635) 15(0,-5.095) 16(-2.54,-5.095) 17(0,-2.555) 18(-2.54,-2.555) 19(0,-0.015) 20(-2.54,-0.015)
  silkscreen extent -14,-27.62 1.68,4.75
HEADER-2X10-100mil_STRAIGHT [mil]
  round 50 / inner round 40 / far side round 50 hole 37: 1(0,0) 2(100,0) 3(0,100) 4(100,100) 5(0,200) 6(100,200) 7(0,300) 8(100,300) 9(0,400) 10(100,400) 11(0,500) 12(100,500) 13(0,600) 14(100,600) 15(0,700) 16(100,700) 17(0,800) 18(100,800) 19(0,900) 20(100,900)
  silkscreen extent -100,-157 172,1058
Inductor [mm]
  rect 0.7x1.8 smd: 1(-0.75,0) 2(0.75,0)
  silkscreen extent -1.38,-1.15 1.35,1.15
INDUCTOR_1515 [mm]
  rect 1.5x2.8 smd: 1(0.8,1.95) 2(3.5,1.95)
  silkscreen extent 0,0 4.3,3.9
LED_0603 [mm]
  rect 1.2x1.1 smd: 1(0.025,-0.025) 2(1.825,-0.025)
  silkscreen extent 2.7,-0.2 2.7,0.25
LME49726 [mm]
  oval 0.41x1.02 smd: 1(-0.975,-2.4) 2(-0.325,-2.4) 3(0.325,-2.4) 4(0.975,-2.4) 5(0.975,2.4) 6(0.325,2.4) 7(-0.325,2.4) 8(-0.975,2.4)
  rect 1.85x1.73 smd: 9(0,0)
  silkscreen extent -1.75,-2.23 1.6,1, body extent -1.6,-1.6 1.6,1.6, height 0.86
MLP-6-LEAD-3X3mm [mm]
  rect 0.45x0.7 smd: 1(1.9,0) 2(0.95,0) 3(0,0) 4(0,-2.8) 5(0.95,-2.8) 6(1.9,-2.8)
  rect 0.525x0.45 smd: 7(-0.525,-1.4) 7(2.425,-1.4)
  rect 2.45x1.65 smd: 7(0.95,-1.4)
  silkscreen extent -1.07,-3.43 2.97,0.63
MOLEX-P4 [mm]
  round 3.3 hole 1.8: 1(0,0) 2(4.2,0) 3(0,-5.5) 4(4.2,-5.5)
  round 0 hole 3: ""(2.1,-12.8)
  silkscreen extent -2.25,-14.75 6.62,2.37
"Mounting Hole" [mm]
  round 5 hole 3.5: 1(0,0)
NC7NZ34 [mm]
  rect 0.3x0.7 smd: 1(-0.75,-1.35) 2(-0.25,-1.35) 3(0.25,-1.35) 4(0.75,-1.35) 5(0.75,1.35) 6(0.25,1.35) 7(-0.25,1.35) 8(-0.75,1.35)
  silkscreen extent -1.3,-1.42 1.05,0.73, body extent -1.05,-0.72 1.05,0.72, height 0.9
PTN78000W [mm]
  round 2.4 hole 1.4: 1(0,0) 2(0,-6.35) 3(0,-9.525) 4(15.875,-9.525) 5(15.875,0)
  silkscreen extent -2.03,-11.55 17.9,2.03
QFN50P400X400-24V9L [mm] "QFN, 24-Leads, Body 4x4mm, Pitch 0.5mm, IPC High Density"
  oval 0.65x0.25 smd: 1(-1.925,1.25) 2(-1.925,0.75) 3(-1.925,0.25) 4(-1.925,-0.25) 5(-1.925,-0.75) 6(-1.925,-1.25) 13(1.925,-1.25) 14(1.925,-0.75) 15(1.925,-0.25) 16(1.925,0.25) 17(1.925,0.75) 18(1.925,1.25)
  oval 0.25x0.65 smd: 7(-1.25,-1.925) 8(-0.75,-1.925) 9(-0.25,-1.925) 10(0.25,-1.925) 11(0.75,-1.925) 12(1.25,-1.925) 19(1.25,1.925) 20(0.75,1.925) 21(0.25,1.925) 22(-0.25,1.925) 23(-0.75,1.925) 24(-1.25,1.925)
  rect 2.5x2.5 smd: 25(0,0)
  silkscreen extent -2.98,-2.1 2.1,2.1, body extent -2.07,-2.07 2.07,2.07, height 1
QFN50P1200X1200-64V1L-MOD [mm] "QFN, 64-Leads, Body 12x12mm, Pitch 0.5mm, IPC High Density, MOD"
  oval 0.85x0.3 smd: 1(-5.875,3.75) 2(-5.875,3.25) 3(-5.875,2.75) 4(-5.875,2.25) 5(-5.875,1.75) 6(-5.875,1.25) 7(-5.875,0.75) 8(-5.875,0.25) 9(-5.875,-0.25) 10(-5.875,-0.75) 11(-5.875,-1.25) 12(-5.875,-1.75) 13(-5.875,-2.25) 14(-5.875,-2.75) 15(-5.875,-3.25) 16(-5.875,-3.75) 33(5.875,-3.75) 34(5.875,-3.25) 35(5.875,-2.75) 36(5.875,-2.25) 37(5.875,-1.75) 38(5.875,-1.25) 39(5.875,-0.75) 40(5.875,-0.25) 41(5.875,0.25) 42(5.875,0.75) 43(5.875,1.25) 44(5.875,1.75) 45(5.875,2.25) 46(5.875,2.75) 47(5.875,3.25) 48(5.875,3.75)
  oval 0.3x0.85 smd: 17(-3.75,-5.875) 18(-3.25,-5.875) 19(-2.75,-5.875) 20(-2.25,-5.875) 21(-1.75,-5.875) 22(-1.25,-5.875) 23(-0.75,-5.875) 24(-0.25,-5.875) 25(0.25,-5.875) 26(0.75,-5.875) 27(1.25,-5.875) 28(1.75,-5.875) 29(2.25,-5.875) 30(2.75,-5.875) 31(3.25,-5.875) 32(3.75,-5.875) 49(3.75,5.875) 50(3.25,5.875) 51(2.75,5.875) 52(2.25,5.875) 53(1.75,5.875) 54(1.25,5.875) 55(0.75,5.875) 56(0.25,5.875) 57(-0.25,5.875) 58(-0.75,5.875) 59(-1.25,5.875) 60(-1.75,5.875) 61(-2.25,5.875) 62(-2.75,5.875) 63(-3.25,5.875) 64(-3.75,5.875)
  silkscreen extent -6.05,-5.1 5.12,5.12, body extent -5.06,-5.06 5.09,5.04, height 1
QFN-124 [mm]
  rect 0.3x0.3 smd: A1(0,0) A2(0,-1) A3(0,-1.5) A4(0,-2) A5(0,-2.5) A6(0,-3) A7(0,-3.5) A8(0,-4) A9(0,-4.5) A10(0,-5) A11(0,-5.5) A12(0,-6) A13(0,-6.5) A14(0,-7) A15(0,-7.5) A16(0,-8) A17(0,-8.5) A18(0,-9.5) A19(1,-9.5) A20(1.5,-9.5) A21(2,-9.5) A22(2.5,-9.5) A23(3,-9.5) A24(3.5,-9.5) A25(4,-9.5) A26(4.5,-9.5) A27(5,-9.5) A28(5.5,-9.5) A29(6,-9.5) A30(6.5,-9.5) A31(7,-9.5) A32(7.5,-9.5) A33(8,-9.5) A34(8.5,-9.5) A35(9.5,-9.5) A36(9.5,-8.5) A37(9.5,-8) A38(9.5,-7.5) A39(9.5,-7) A40(9.5,-6.5) A41(9.5,-6) A42(9.5,-5.5) A43(9.5,-5) A44(9.5,-4.5) A45(9.5,-4) A46(9.5,-3.5) A47(9.5,-3) A48(9.5,-2.5) A49(9.5,-2) A50(9.5,-1.5) A51(9.5,-1) A52(9.5,0) A53(8.5,0) A54(8,0) A55(7.5,0) A56(7,0) A57(6.5,0) A58(6,0) A59(5.5,0) A60(5,0) A61(4.5,0) A62(4,0) A63(3.5,0) A64(3,0) A65(2.5,0) A66(2,0) A67(1.5,0) A68(1,0) B1(0.75,-1.5) B2(0.75,-2) B3(0.75,-2.5) B4(0.75,-3) B5(0.75,-3.5) B6(0.75,-4) B7(0.75,-4.5) B8(0.75,-5) B9(0.75,-5.5) B10(0.75,-6) B11(0.75,-6.5) B12(0.75,-7) B13(0.75,-7.5) B14(0.75,-8) B15(1.5,-8.75) B16(2,-8.75) B17(2.5,-8.75) B18(3,-8.75) B19(3.5,-8.75) B20(4,-8.75) B21(4.5,-8.75) B22(5,-8.75) B23(5.5,-8.75) B24(6,-8.75) B25(6.5,-8.75) B26(7,-8.75) B27(7.5,-8.75) B28(8,-8.75) B29(8.75,-8) B30(8.75,-7.5) B31(8.75,-7) B32(8.75,-6.5) B33(8.75,-6) B34(8.75,-5.5) B35(8.75,-5) B36(8.75,-4.5) B37(8.75,-4) B38(8.75,-3.5) B39(8.75,-3) B40(8.75,-2.5) B41(8.75,-2) B42(8.75,-1.5) B43(8,-0.75) B44(7.5,-0.75) B45(7,-0.75) B46(6.5,-0.75) B47(6,-0.75) B48(5.5,-0.75) B49(5,-0.75) B50(4.5,-0.75) B51(4,-0.75) B52(3.5,-0.75) B53(3,-0.75) B54(2.5,-0.75) B55(2,-0.75) B56(1.5,-0.75)
  round 0.508 hole 0.305 mask+0: PAD(3.912,-5.664) PAD(3.912,-4.775) PAD(3.912,-3.912) PAD(4.75,-5.664) PAD(4.75,-4.775) PAD(4.75,-3.912) PAD(5.588,-5.664) PAD(5.588,-4.775) PAD(5.588,-3.912)
  rect 2.8x2.8 smd mask+0.102: PAD(4.75,-4.75)
  silkscreen extent -0.79,-9.88 9.87,0.38, body extent -0.35,-9.88 9.9,0.38, height 2
RJ11 [mm]
  round 1.79 hole 0.89: 1(0,0) 2(1.27,2.54) 3(2.54,0) 4(3.81,2.54)
  round 0 hole 3.25: ""(-3.18,-6.35) ""(6.98,-6.35)
  Keep-Out Layer lines w0.254: -0.675,-16.89 -0.675,-16.775
  silkscreen extent -4.81,-16.89 8.6,3.81, body extent -4.82,-16.88 8.62,3.85, height 12.85
SJ-3524-SMT [mm]
  rect 2.2x2.8 smd: 1(-1.1,-3.7) 3(0.9,3.7)
  rect 2.8x2.8 smd: 2(8.3,-3.7) 10(12.4,0.75)
  round 0 hole 1.7: ""(0,0) ""(7,0)
  silkscreen extent -5.8,-4.69 11.07,3, body extent -5.86,-3.08 10.98,2.99, height 5
SOT23-5AL_MOD(1-07) [mm] "SOT23, 5-Leads, Body 2.9x1.6mm, Pitch 0.95mm, Lead Span 2.8mm, IPC High Density"
  rect 1x0.7 smd: 1(-1.2,0.95) 2(-1.2,0) 3(-1.2,-0.95) 4(1.2,-0.95) 5(1.2,0.95)
  silkscreen extent -1.33,-1.55 0.35,1.95, body extent -0.9,-1.55 0.9,1.55, height 1.45
SOT23-5AL_MOD(1-07-26) [mm] "SOT23, 5-Leads, Body 2.9x1.6mm, Pitch 0.95mm, Lead Span 2.8mm, IPC High Density"
  rect 1x0.7 smd: 1(-1.3,0.95) 2(-1.3,0) 3(-1.3,-0.95) 4(1.3,-0.95) 5(1.3,0.95)
  silkscreen extent -1.32,-1.55 0.35,1.95, body extent -0.9,-1.55 0.9,1.55, height 1.45
SOT223-6L [mm] "SOT223, 6-Leads, Body 6.5x3.5mm, Pitch 1.27mm, Lead Span 7mm, IPC High Density"
  rect 1.9x0.6 smd: 1(-2.95,2.54) 2(-2.95,1.27) 3(-2.95,0) 4(-2.95,-1.27) 5(-2.95,-2.54)
  rect 1.9x3.1 smd: 6(2.95,0)
  silkscreen extent -3.07,-3.3 1.7,3.41, body extent -1.77,-3.27 1.77,3.27, height 1.8
SOT363-6L [mm] "SOT363, 6-Leads, Body 2x1.3mm, Pitch 0.65mm, Lead Span 2.1mm, IPC High Density"
  rect 0.65x0.4 smd: 1(-0.95,0.65) 2(-0.95,0) 3(-0.95,-0.65) 4(0.95,-0.65) 5(0.95,0) 6(0.95,0.65)
  silkscreen extent -1.07,-1.1 0.25,1.52, body extent -0.7,-1.1 0.7,1.1, height 1
TP [mm]
  round 1 smd: 1(0,0)
TSOP65P640-8AL [mm] "TSOP, 8-Leads, Body 3x4.4mm, Pitch 0.65mm, IPC High Density"
  oval 1.4x0.35 smd: 1(-2.8,0.975) 2(-2.8,0.325) 3(-2.8,-0.325) 4(-2.8,-0.975) 5(2.8,-0.975) 6(2.8,-0.325) 7(2.8,0.325) 8(2.8,0.975)
  silkscreen extent -2.92,-1.55 1.7,1.82, body extent -2.25,-1.55 2.25,1.55, height 1.1
TSSOP50P490-10AL [mm] "TSSOP, 10-Leads, Body 3x3mm, Pitch 0.5mm, IPC High Density"
  oval 1.45x0.25 smd: 1(-2.025,1) 2(-2.025,0.5) 3(-2.025,0) 4(-2.025,-0.5) 5(-2.025,-1) 6(2.025,-1) 7(2.025,-0.5) 8(2.025,0) 9(2.025,0.5) 10(2.025,1)
  silkscreen extent -2.15,-1.6 0.9,1.8, body extent -1.6,-1.6 1.6,1.6, height 1.1
X_TAL [mm]
  rect 5.6x2.1 smd: 1(0,0) 2(9.5,0)
  silkscreen extent -0.95,-2.35 10.45,2.38

## Part data
C1 C3 C13: library part Cap, "MLCC 1uF 0603 X5R 10V"
C2: library part Cap, "MLCC 15pF 0603 C0G 50V"
C4 C64 C65 C82 C83: "Al Elec 100uF CaseD 16V"
C5 C6: library part Cap, "MLCC 0.10uF 0603 X7R 50V"
C7 C133 C134 C135 C136 C141 C142 C143 C144: library part Cap, "MLCC 2.2uF 1206 X7R 50V"
C8 C9 C28 C30 C32 C33 C34 C35 C39: library part Cap, "MLCC 100nF 0603 X7R 16V"
C10 C17 C26: library part Cap, "MLCC 4.7uF 0603 X5R 6.3V"
C11: library part Cap, "MLCC 330pF 0603 COG 50V"
C12 C14 C15 C16: library part Cap, "MLCC 10uF 0805 X5R 10V"
C18 C19 C20 C21 C22 C23 C24 C25 C36 C40 C41 C42 C43 C44 C47 C52 C53 C56 C62 C63 C66 C69 C71 C74 C75 C78 C80 C81 C84 C137 C138 C139 C140 C145 C146 C147 C148: library part Cap, "MLCC 100nF 0402 X7R 16V"
C27 C29: library part Cap, "MLCC 10nF 0603 X7R 50V"
C31 C58 C60: library part Cap, "MLCC 2.2uF 0603 X5R 10V"
C37 C38: library part Cap, "MLCC 33pF 0603 COG 50V"
C45 C46 C67 C68 C89 C90 C95 C96 C101 C102 C107 C108 C113 C114 C119 C120 C125 C126 C131 C132: "Al Elec 10uF CaseB 16V"
C48 C49 C50 C51 C54 C55 C70 C72 C73 C76 C77 C91 C92 C103 C104 C115 C116 C127 C128: library part Cap, "MLCC 10000pF 0402 X7R 25V"
C57 C59 C61 C79: "Al Elec 4.7uF CaseB 35V"
C85 C86 C87 C88 C97 C98 C99 C100 C109 C110 C111 C112 C121 C122 C123 C124: library part Cap, "MLCC 470pF 0603 COG 50V"
C93 C94 C105 C106 C117 C118 C129 C130: library part Cap, "Temperature Compensating 2700pF 0402 COG 10V"
D1 D2 D3 D4 D5: library part LED2, "LED, GREEN, 0603"
J1: library part Component_1, "Molex connector"
J2: library part HEADER-2X10, "IDC Boxed Header, Right Angle, PCB Mount, Polarised, 20 Way, 2x10, 0.1\" Pitch"
J3: library part HEADER-2X10_STRAIGHT
J4: library part 787924-1, "USB 2.0 connectors  Connecteurs USB 2.0"
L1: "Power Inductor, 2.2uH, 0.7A, 260mR DCR"
L2: "Power Inductor, 3.3uH, 1.7A, 78mR DCR"
MTH1 MTH2 MTH3 MTH4: library part MountingHole
R1: library part Res3, "RES 21k 0603 1%"
R2: library part Res3, "RES 24.9K 0603 1%"
R3 R9 R13 R20 R23 R53 R55 R73 R75 R76 R77 R89 R91 R92 R93 R105 R107 R108 R109 R121 R123 R124 R125: library part Res3, "RES 10k 0603 1%"
R4 R5 R21 R38 R39 R40: library part Res3, "RES 1k 0603 1%"
R6: library part Res3, "RES 200R 0603 1%"
R7 R68 R69 R70 R71 R78 R79 R80 R81 R84 R85 R86 R87 R94 R95 R96 R97 R100 R101 R102 R103 R110 R111 R112 R113 R116 R117 R118 R119 R126 R127 R128 R129: library part Res3, "RES 634R 0603 1%"
R8 R15: library part Res3, "RES 1.8k 0603 1%"
R10 R18: library part Res3, "RES 6.8k 0603 1%"
R11: library part Res3, "RES 2.2R 0603 1%"
R12: library part Res3, "RES 1.5k 0603 1%"
R14 R24 R25 R26 R27 R28 R29 R30 R31 R32 R33 R34 R35 R36 R37 R41 R42 R43 R46 R47 R48 R49 R50 R51: library part Res3, "RES 33R 0603 1%"
R16 R17 R19: library part Res3, "RES 47k 0603 1%"
R22: library part Res3, "RES 8k06 0603 1%"
R44: library part Res3, "RES 2.2M 0603 5%"
R45 R52 R54: library part Res3, "RES 470R 0603 1%"
R56 R57 R58 R59 R60 R61 R62 R63 R64 R65 R66 R67: library part Res3, "RES 4.7k 0603 1%"
R72 R74 R82 R83 R88 R90 R98 R99 R104 R106 R114 R115 R120 R122 R130 R131: library part Res3, "RES 100k 0603 1%"
U2: library part PTN78000, "1.5-A, Wide-Input Adjustable Switching Regulator"
U3: "Dual In/Single Out Autoswitching Power MUX"
U4: "1.5 MHz, 600 mA Step-Down  DC-DC Converter"
U6: library part NCP303LSN30, "Voltage Detector Series with Programmable Delay"
U7: library part NC7SZ157, "TinyLogic UHS 2 Input Non-Inverting Multiplexer"
U8: "1.5A Low Voltage Current Mode Synchronous PWM Buck  Regulator"
U9: library part NC7WZ07, "TinyLogic UHS Dual Buffer"
U10: "Voltage Detector Serieswith Programmable Delay"
U11: "USB-IF 'High-Speed' compliant to USB 2.0"
U12: "4-megabit  2.3-volt or  2.7-volt  Minimum  SPI Serial Flash  Memory"
U14: "TinyLogic UHS Unbuffered Inverter"
U15: "Fractional-N Clock Multiplier with Internal LCO"
U16 U17 U18: "TinyLogic UHS Triple Buffer"
U21 U22 U23 U24 U25 U26 U27 U28: "High Current, Low Distortion Rail-to-Rail Output Audio Operational Amplifier"
Y1: library part XTAL, "Crystal, 13MHz, HC49/US SMD, Fundamental, 18pF, Tol. ±30ppm, Stab. ±30ppm"

## Via types
v1: diameter 0.61, hole 0.305, Top Layer to Bottom Layer, 227 vias
v2: diameter 0.406, hole 0.305, Top Layer to Bottom Layer, 32 vias
v3: diameter 1.27, hole 0.711, Top Layer to Bottom Layer, 27 vias
v4: diameter 1.016, hole 0.508, Top Layer to Bottom Layer, 20 vias
v5: diameter 0.66, hole 0.33, Top Layer to Bottom Layer, tented top, 4 vias
v6: diameter 0.61/0.61 (per signal layer), hole 0.305, Top Layer to Bottom Layer, 1 vias

## Nets (pads, with @x,y where several pads share a name; then routed paths per layer and width w, separated by ;. In a path a pad name is that pad's centre, name@x,y a point inside that pad or via, vN(x,y) a via of type N, cw(c..) or ccw(c..) an arc to the next point about the centre after c; other vN are vias at no path point)
1V0_PG: R19.1 U9.1 U9.3 U10.1 | length 5.2
  Top Layer w0.152: 44.475,64.795 44.475,63.678 44.66,63.493 U9.3@45.14,63.493
  Top Layer w0.254: U10.1@43.34,65.043 44.228,65.043 44.475,64.795 45.138,64.795 U9.1@45.14,64.793 ; R19.1@45.14,62.043 U9.3@45.14,63.493
3V3_PG: R13.2 U6.1 U8.6 | length 58.6
  Top Layer w0.152: v1(33.731,66.491) 33.752,66.512 U8.6@33.752,67.566
  Top Layer w0.254: U6.1@74.652,69.075 75.652,69.075 R13.2@76.452,69.875 v1(77.749,69.875)
  Bottom Layer w0.152: v1@33.731,66.472 35.382,64.821 47.734,64.821 48.014,64.541 48.456,64.541 48.506,64.592 50.125,64.592 50.43,64.287 51.867,64.287 52.722,63.432 52.722,62.797 52.4,62.476 52.4,61.578 52.891,61.087 53.586,61.087 53.789,61.29 54.242,61.29 54.759,60.774 55.431,60.774 55.778,61.121 55.778,61.232 56.091,61.544 56.533,61.544 56.838,61.239 57.142,61.239 58.369,62.466 58.369,65.684 61.76,69.075 75.489,69.075 76.289,69.875 v1(77.749,69.875)
+1V0: C15.2 C16.2 C17.2 C18.2 C19.2 C20.2 C21.2 L2.2 R11.1 R15.1 TP63.1 U5.A19 U5.A34 U5.A53 U5.A68 U5.B5 U5.B15 U5.B28 U5.B43 U5.B56 U10.2 | length 43.5
  Top Layer w0.152: U5.B5@57.39,62.843 57.512,62.722 57.512,62.599 58.47,61.64 58.724,61.64 59.38,61.64 59.833,62.093 U5.B56@60.14,62.093
  Top Layer w0.305: L2.2@41.605,69.52 41.973,69.152 R15.1@41.973,66.65 R15.1@42.393,66.23 ; C16.2@46.482,69.552 C16.2@46.49,69.543 ; v1(46.507,70.968) 46.761,71.222 TP63.1@47.828,71.222 ; v1(49.2,54) 49.555,54.356 49.555,54.94 49.403,54.94 C20.2@49.251,55.093 ; C20.2@49.24,55.093 49.245,55.098 49.276,55.129 49.469,55.322 50.774,55.322 51.002,55.093 U5.A34@51.39,55.093 51.64,55.093 U5.B28@52.14,55.593 ; C21.2@49.69,63.043 50.94,63.043 U5.A19@51.39,62.593 51.64,62.593 U5.B15@52.14,62.093 ; U5.B43@60.14,55.593 60.64,55.093 U5.A53@60.89,55.093 62.698,55.093 C18.2@63.002,55.397 C18.2@63.056,55.343 ; U5.B56@60.14,62.093 60.64,62.593 U5.A68@60.89,62.593 C19.2@62.34,62.593 62.34,63.458 v1(62.509,63.627) ; R15.1@42.393,66.23 42.393,65.043 42.393,65.024 R15.1@42.393,66.23
  Top Layer w0.508: U10.2@42.367,65.066 U10.2@42.39,65.043 ; v1(61.722,54.534) 61.722,54.305 61.76,54.267 62.221,54.267
  Top Layer w0.635: L2.2@41.554,69.596 43.028,69.596 ; v1@43.18,71.145 v1(43.18,71.12) 43.18,69.748 43.028,69.596 ; C15.2@44.49,69.543 44.501,69.554 C15.2@44.501,69.621 ; v1(44.501,70.968) C15.2@44.501,69.621 ; C15.2@44.526,69.647 C15.2@44.501,69.621 ; v1(46.507,70.968) C16.2@46.507,69.577 ; v3@48.287,69.543 v3(48.336,69.494) ; v1(48.565,63.068) 49.665,63.068 C21.2@49.69,63.043 ; C20.2@49.276,55.129 v1(49.276,56.134) ; 62.221,54.267 62.841,54.267 C17.2@63.002,54.105 ; C18.2@63.002,55.397 C17.2@63.002,54.105 ; C17.2@63.056,54.051 C17.2@63.002,54.105 ; 43.028,69.596 44.475,69.596 C15.2@44.501,69.621 ; C16.2@46.507,69.577 46.482,69.552 C16.2@46.507,69.577
  Top Layer w0.889: C15.2@44.49,69.543 C16.2@46.49,69.543 v3@48.287,69.543
  Bottom Layer w0.305: R11.1@49.2,52.363 R11.1@49.239,52.324
  Bottom Layer w0.635: R11.1@49.2,52.363 v1(49.2,54)
+1V8: C31.2 C32.2 TP62.1 U11.21 U13.5 | length 16.5
  Top Layer w0.152: TP62.1@69.063,53.95 70.968,53.95 v1(71.399,53.518) ; U11.21@77.927,54.789 U11.21@77.931,54.793
  Top Layer w0.203: 77.927,53.975 U11.21@77.927,54.789
  Top Layer w0.254: v1(71.399,53.518) 76.283,53.518 76.486,53.721 77.673,53.721 77.927,53.975
  Top Layer w0.305: v1(71.399,53.518) v1@71.399,53.645
  Bottom Layer w0.508: v1(71.399,53.518) C32.2@70.49,54.427 ; C31.2@71.686,54.843 C32.2@70.49,54.843 ; U13.5@73.49,54.843 71.99,54.843 C32.2@70.49,54.843 ; C32.2@70.49,54.427 C32.2@70.49,54.843 ; C32.2@70.49,54.427 C32.2@70.49,54.843
+3V3: C11.2 C12.2 C22.2 C23.2 C24.2 C25.2 C26.2 C28.2 C33.2 C34.2 C39.2 C40.2 C41.2 C42.2 C43.2 C44.2 C46.1 C49.2 C50.2 C51.2 C52.2 C55.2 C56.2 C68.1 C71.2 C72.2 C73.2 C74.2 C77.2 C78.2 D5.1 L1.2 R10.1 R16.1 R17.2 R19.2 R20.1 R57.2 R58.2 R63.2 R64.2 R65.2 TP61.1 U5.A2 U5.A17 U5.A36 U5.A51 U5.B1 U5.B4 U5.B14 U5.B29 U5.B32 U5.B42 U6.2 U7.5 U9.5 U11.3 U11.4 U11.17 U12.3 U12.7 U12.8 U14.5 U15.1 U16.8 U17.8 U18.8 U19.4 U19.6 U19.8 U19.24 U20.4 U20.6 U20.8 U20.24 | length 157.6
  Top Layer w0.152: U5.B29@52.89,54.843 52.89,55.029 53.12,55.258 53.987,55.258 54,55.245 54.314,55.245 54.405,55.153 54.39,55.138 U5.B32@54.39,54.843 ; U5.B4@57.89,62.843 57.89,62.72 58.152,62.459 59.233,62.459 59.39,62.616 U5.B1@59.39,62.843 ; v1(73.025,56.109) 73.165,55.968 U11.17@76.256,55.968
  Top Layer w0.203: C77.2@24.79,39.843 25.536,40.589 25.536,41.711 25.869,42.043 U20.24@26.215,42.043 ; C72.2@31.563,50.293 C72.2@31.572,50.284 ; U20.8@32.334,47.662 U20.8@32.34,47.668 32.334,47.674 32.334,48.464 ; U20.6@33.34,47.668 33.34,48.296 C71.2@34.163,49.119 34.34,48.941 U20.4@34.34,47.668 ; R19.2@46.84,62.043 47.89,63.093 47.89,63.729 47.476,64.143 U9.5@47.04,64.143 ; v1(54.483,45.136) 53.772,44.425 53.772,42.474 54.153,42.093 55.504,42.093 v1@58.34,44.929 ; v1@59.665,47.854 v1(59.792,47.981) 59.233,47.422 ; v1(62.27,50.606) 62.307,50.643 C40.2@62.89,50.643 62.94,50.693 U15.1@64.465,50.693 ; C41.2@67.753,47.293 C41.2@68.099,47.293 ; U16.8@67.84,46.243 68.367,46.243 68.58,46.457 68.58,46.812 C41.2@68.099,47.293 ; v1(69.113,47.168) 68.988,47.293 C41.2@68.099,47.293 ; C56.2@80.09,39.543 80.112,39.564 80.112,41.758 80.397,42.043 U19.24@81.315,42.043 ; U11.3@80.106,56.468 81.518,56.468 ; U11.4@80.106,56.968 81.018,56.968 81.518,56.468 ; C33.2@82.106,55.88 81.966,56.021 81.518,56.468 ; C50.2@86.84,50.293 87.436,49.697 87.436,47.672 U19.8@87.44,47.668 87.44,47.081 87.63,46.891 88.265,46.891 88.44,47.067 U19.6@88.44,47.668 88.44,48.258 88.595,48.412 88.76,48.412 C49.2@89.44,49.093 U19.4@89.44,47.668 ; v1@58.34,44.929 58.34,45.034 v1@58.34,44.929 ; 59.233,47.422 58.674,47.422 59.233,47.422
  Top Layer w0.305: v1(31.369,51.41) 31.369,50.303 C72.2@31.359,50.293 31.359,49.391 32.286,48.464 32.334,48.464 ; v1(33.985,50.825) 33.985,49.296 C71.2@34.163,49.119 ; v1(46.838,60.757) v1@46.838,60.909 ; 51.94,52.393 51.587,52.746 51.587,53.466 51.944,53.823 52.325,53.823 52.39,53.888 U5.A36@52.39,54.093 52.39,54.343 U5.B29@52.89,54.843 ; C24.2@52.527,64.922 C24.2@52.527,65.08 ; C24.2@52.54,65.093 C24.2@52.527,65.08 ; v1(52.578,66.065) 52.527,66.015 C24.2@52.527,65.08 ; U5.B14@52.89,62.843 52.89,62.862 52.39,63.362 U5.A17@52.39,63.593 ; v1@53.206,68.358 v1(53.238,68.326) ; U12.7@56.593,69.628 57.575,69.628 C34.2@58.801,70.854 ; U12.8@56.593,70.898 56.598,70.893 C34.2@58.84,70.893 C34.2@58.801,70.854 ; v1(58.801,69.545) C34.2@58.801,70.854 ; U5.B42@59.39,54.843 59.89,54.343 U5.A51@59.89,54.093 ; U5.B1@59.39,62.843 59.89,63.343 U5.A2@59.89,63.593 59.89,65.043 C23.2@60.125,65.278 ; C22.2@59.919,52.822 60.518,52.822 60.528,52.832 v1(60.528,52.908) ; v1(59.944,66.421) C23.2@59.944,65.459 ; C23.2@60.14,65.293 C23.2@60.125,65.278 ; TP61.1@67.132,62.967 67.132,64.525 67.132,64.555 C11.2@67.152,64.575 ; v1(73.381,70.028) 74.649,70.028 U6.2@74.652,70.025 ; C33.2@81.966,56.021 v1(81.966,57.15) ; C49.2@89.44,49.093 89.44,50.147 v1(89.56,50.267) ; R57.2@96.887,44.526 R58.2@96.887,46.038 ; R58.2@96.899,46.05 R58.2@96.887,46.038 ; v1(98.247,45.999) 96.926,45.999 R58.2@96.887,46.038 ; U5.A17@52.39,63.593 C24.2@52.39,64.915 ; U5.A17@52.39,63.593 C24.2@52.39,64.915 ; C24.2@52.39,64.915 C24.2@52.39,64.943 ; C24.2@52.39,64.915 C24.2@52.39,64.943 ; C24.2@52.39,64.943 52.452,65.004 C24.2@52.527,65.08 ; C24.2@52.39,64.943 C24.2@52.527,65.08 ; U5.A51@59.89,54.093 59.89,52.822 59.89,52.743 U5.A51@59.89,54.093 ; C23.2@59.944,65.459 C23.2@60.125,65.278 ; C23.2@59.944,65.459 C23.2@60.125,65.278
  Top Layer w0.508: v4@19.431,45.923 v4(19.39,45.883) C68.1@19.39,44.493 19.406,44.478 19.406,40.843 20.218,40.03 21.078,40.03 C73.2@21.09,40.043 C74.2@22.39,40.043 22.873,40.043 23.139,39.776 23.524,39.776 C78.2@23.59,39.843 C77.2@24.79,39.843 ; R63.2@38.19,52.343 38.21,52.324 v1(39.522,52.324) ; R65.2@40.19,48.443 R64.2@41.69,48.443 41.696,48.438 v1(43.155,48.438) ; v1@46.838,60.909 46.838,62.04 R19.2@46.84,62.043 ; C28.2@49.59,67.643 49.59,67.79 50.158,68.358 ; R20.1@49.971,69.243 49.962,69.234 49.962,68.555 50.158,68.358 ; v1@53.206,68.358 U12.3@51.893,68.358 50.158,68.358 ; v4(72.492,42.799) 72.633,42.799 C46.1@74.19,44.356 ; C46.1@74.19,44.393 74.19,41.43 75.578,40.043 C52.2@76.39,40.043 C51.2@77.69,40.043 78.19,39.543 C55.2@78.89,39.543 C56.2@80.09,39.543
  Top Layer w0.635: 51.892,52.375 C25.2@51.587,52.07 ; v4(63.779,64.618) 65.21,64.618 C12.2@65.252,64.575 ; v4@65.278,63.246 v4@65.252,63.272 ; C25.2@51.587,52.07 51.587,51.885 C26.2@51.586,50.384 v1(51.587,49.682) C25.2@51.587,52.07 ; v4@65.252,63.272 65.252,63.449 C12.2@65.252,64.575 ; v4@65.252,63.272 C12.2@65.252,64.575 ; C12.2@65.252,64.575 65.302,64.525 C11.2@67.132,64.525 ; C11.2@67.132,64.525 67.152,64.525 R10.1@68.652,64.525 ; C11.2@67.132,64.525 R10.1@68.652,64.525 ; R10.1@68.652,64.525 L1.2@70.402,64.525 R10.1@68.652,64.525
  Bottom Layer w0.152: R16.1@4.892,23.369 R16.1@4.941,23.419
  Bottom Layer w0.203: v1(54.483,45.136) 54.49,45.143 C42.2@55.39,45.143 C42.2@55.397,45.136 ; U17.8@58.039,46.142 U17.8@58.04,46.143 58.04,45.414 v1(58.42,45.034) ; v1(62.89,43.561) 63.464,44.135 C43.2@64.11,44.135 64.11,44.958 63.271,44.958 U18.8@63.094,44.78
  Bottom Layer w0.305: v1(3.759,21.057) 3.746,21.069 C44.2@2.48,21.069 2.489,21.079 2.489,21.666 2.896,22.073 2.896,23.216 3.048,23.368 3.579,23.368 U7.5@3.58,23.369 R16.1@4.892,23.369 ; R16.1@4.941,23.419 4.941,23.994 R17.2@5.99,25.043 ; v1(81.966,57.15) 83.94,55.175 C39.2@83.94,53.79 U14.5@83.94,52.293
  other v4: 65.227,63.449
+4V3: C2.2 C3.2 C45.1 C47.2 C48.2 C53.2 C54.2 C67.1 C69.2 C70.2 C75.2 C76.2 C133.2 C134.2 C135.2 C136.2 C137.2 C138.2 C139.2 C140.2 C141.2 C142.2 C143.2 C144.2 C145.2 C146.2 C147.2 C148.2 J6.1 J7.1 J8.1 J9.1 J10.1 J11.1 J12.1 J13.1 R2.1 TP54.1 U1.4 U19.44 U19.53 U20.44 U20.53 U21.8 U22.8 U23.8 U24.8 U25.8 U26.8 U27.8 U28.8 | length 110.2
  Top Layer w0.203: 33.814,35.248 33.84,35.274 U20.44@33.84,35.918 ; U20.53@37.965,40.043 39.307,40.043 ; 88.925,35.103 88.925,35.865 U19.44@88.951,35.89
  Top Layer w0.254: C146.2@25.44,24.268 C146.2@25.527,24.355 ; C138.2@80.586,24.259 80.618,24.291 U23.8@80.618,25.32 ; U19.53@93.065,40.043 94.247,40.043 94.361,40.157 ; C146.2@25.527,24.355 25.527,25.343 25.527,25.349 C146.2@25.527,24.355
  Top Layer w0.305: C141.2@9.347,22.089 11.526,24.268 C145.2@11.74,24.268 U25.8@11.74,25.253 ; C142.2@22.54,22.318 23.436,22.318 C146.2@25.4,24.282 ; C76.2@31.145,34.336 C76.2@31.271,34.462 ; C76.2@31.166,34.462 33.028,34.462 33.814,35.248 ; C143.2@36.34,22.318 37.015,22.318 38.965,24.268 C147.2@39.14,24.268 U26.8@39.14,25.343 ; 39.307,40.043 39.621,40.357 39.726,40.462 ; C144.2@50.24,22.318 51.19,22.318 52.375,23.503 52.375,23.952 52.691,24.268 C148.2@53.14,24.268 U28.8@53.14,25.343 ; C133.2@63.91,22.309 64.93,22.309 65.989,23.368 65.989,24.003 66.245,24.259 C137.2@66.81,24.259 66.81,25.284 U21.8@66.835,25.309 ; C134.2@77.486,22.209 77.502,22.225 78.537,22.225 79.731,23.419 79.731,23.927 80.063,24.259 C138.2@80.586,24.259 ; C54.2@86.627,33.16 86.665,33.123 v1(86.665,31.953) ; C54.2@86.639,33.172 86.627,33.184 C53.2@86.627,34.36 87.876,34.36 88.131,34.615 88.437,34.615 88.925,35.103 ; C135.2@91.587,22.184 91.628,22.225 92.405,22.225 93.624,23.444 93.624,23.978 93.906,24.259 C139.2@94.362,24.259 94.362,25.318 U22.8@94.391,25.347 ; C136.2@105.462,22.195 106.218,22.195 107.518,23.495 107.518,24.079 107.784,24.345 C140.2@108.262,24.345 U24.8@108.262,25.42
  Top Layer w0.508: v3(6.909,18.212) 6.909,20.387 C141.2@8.84,22.318 ; C141.2@9,22.089 C141.2@9.347,22.089 ; v3(20.472,22.276) C142.2@22.53,22.276 ; C75.2@31.145,33.136 C75.2@31.145,33.147 ; C76.2@31.145,34.336 C75.2@31.145,33.147 ; v1(32.36,33.071) v1@32.283,33.147 ; v3(34.265,22.174) 36.196,22.174 C143.2@36.34,22.318 ; 39.726,40.462 42.393,40.462 ; v3(48.133,22.276) 50.198,22.276 C144.2@50.24,22.318 ; v4(48.641,39.294) C67.1@47.29,39.293 45.34,41.243 C69.2@44.29,41.243 C70.2@43.174,41.243 ; v3@56.439,31.242 v3@56.44,31.243 ; v3(61.773,22.301) 63.902,22.301 C133.2@63.91,22.309 ; v3(75.387,22.25) 77.445,22.25 C134.2@77.486,22.209 ; v3(89.51,22.174) 91.577,22.174 C135.2@91.587,22.184 ; 94.361,40.157 94.615,40.411 97.425,40.411 C48.2@98.114,41.1 ; v3(103.378,22.174) 105.441,22.174 C136.2@105.462,22.195 ; C75.2@31.145,33.147 31.14,33.147 C75.2@31.145,33.147 ; C75.2@31.145,33.147 v1@32.283,33.147 ; C75.2@31.145,33.147 v1@32.283,33.147 ; 42.393,40.462 43.132,41.202 C70.2@43.174,41.243 ; 42.393,40.462 C70.2@43.174,41.243
  Top Layer w0.635: TP54.1@54.534,31.242 v3@56.439,31.242 ; U1.4@60.36,35.143 60.35,35.133 60.35,33.934 59.94,33.524 C2.2@59.94,31.293 59.89,31.243 C3.2@58.19,31.243 ; C48.2@98.114,41.1 100.083,41.1 C45.1@102.39,38.793 102.408,38.811 v4(103.886,38.811) ; C3.2@58.19,31.243 v3(56.566,31.242) 56.44,31.243 C3.2@58.19,31.243